# Altium PCB PIC32ETH.PcbDoc (part 1 of 2)
Units mm, origin at the board's own origin, x right, y up, seen from the top; angles counter-clockwise.
Board outline 150 x 100 mm, 4 copper layers (Layer Top, Plane 1, Plane 2, Layer Bottom), stack 1.798 mm thick; 158 components, 118 nets, 530 pads, 132 vias.
Unrouted connection lines stored in the file: 140.
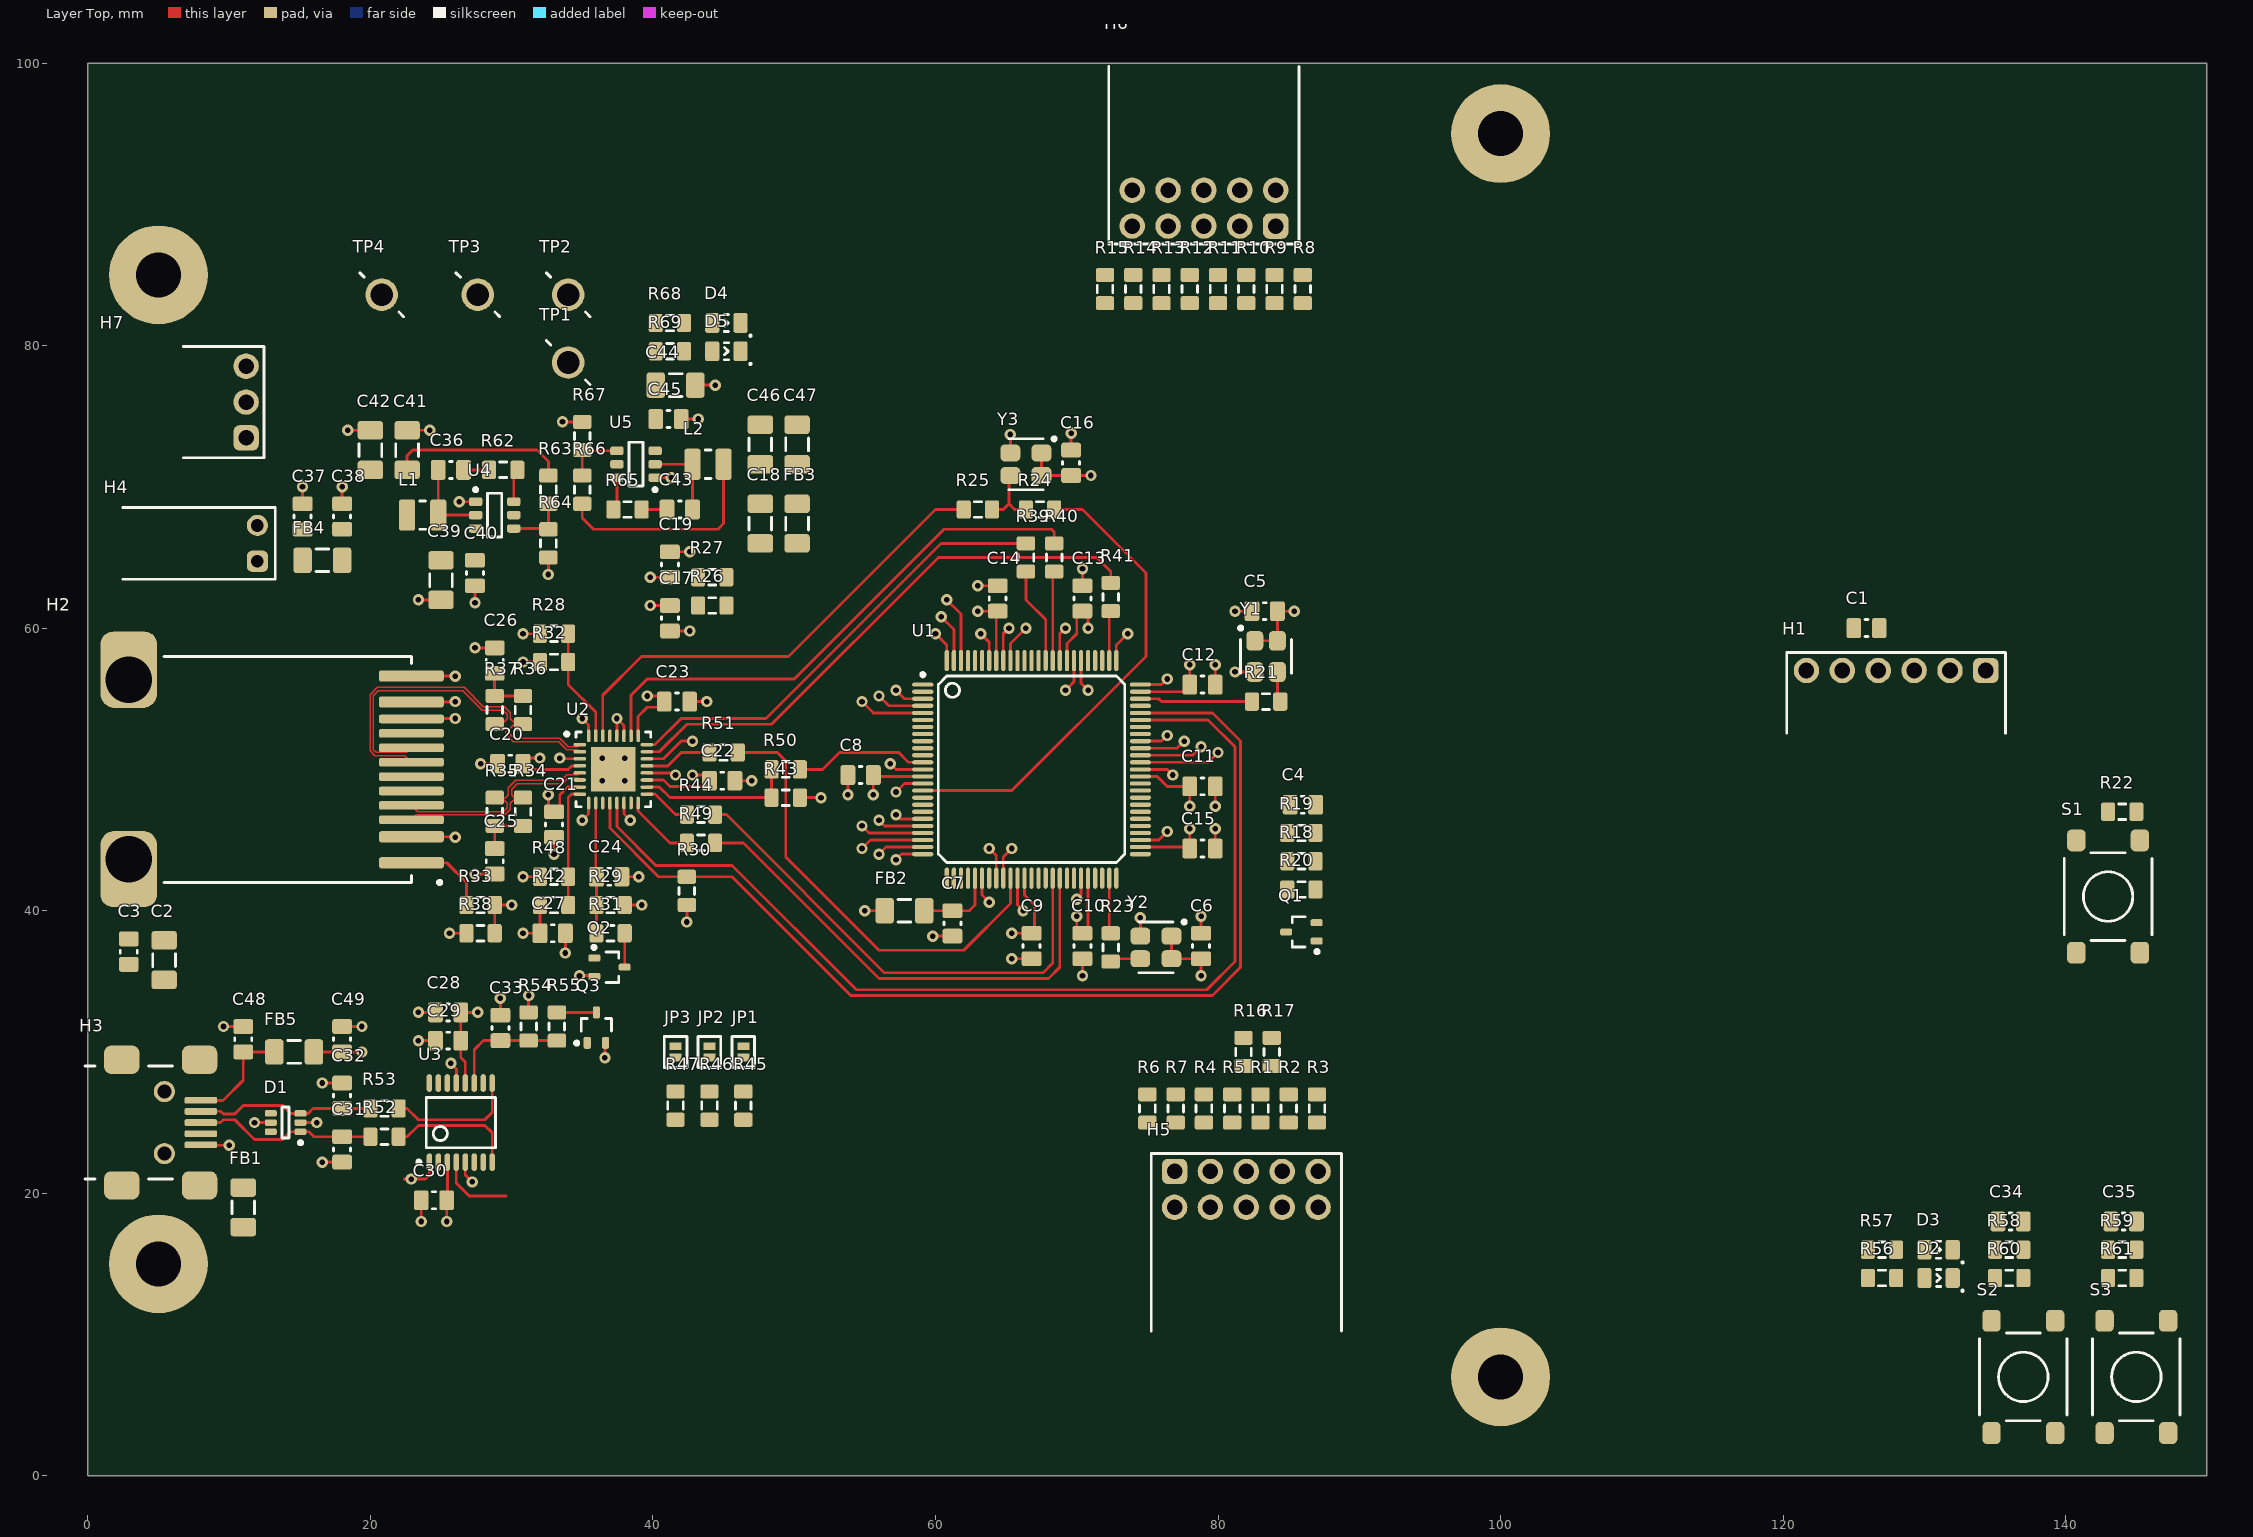
[diagram p0: Layer Top view]
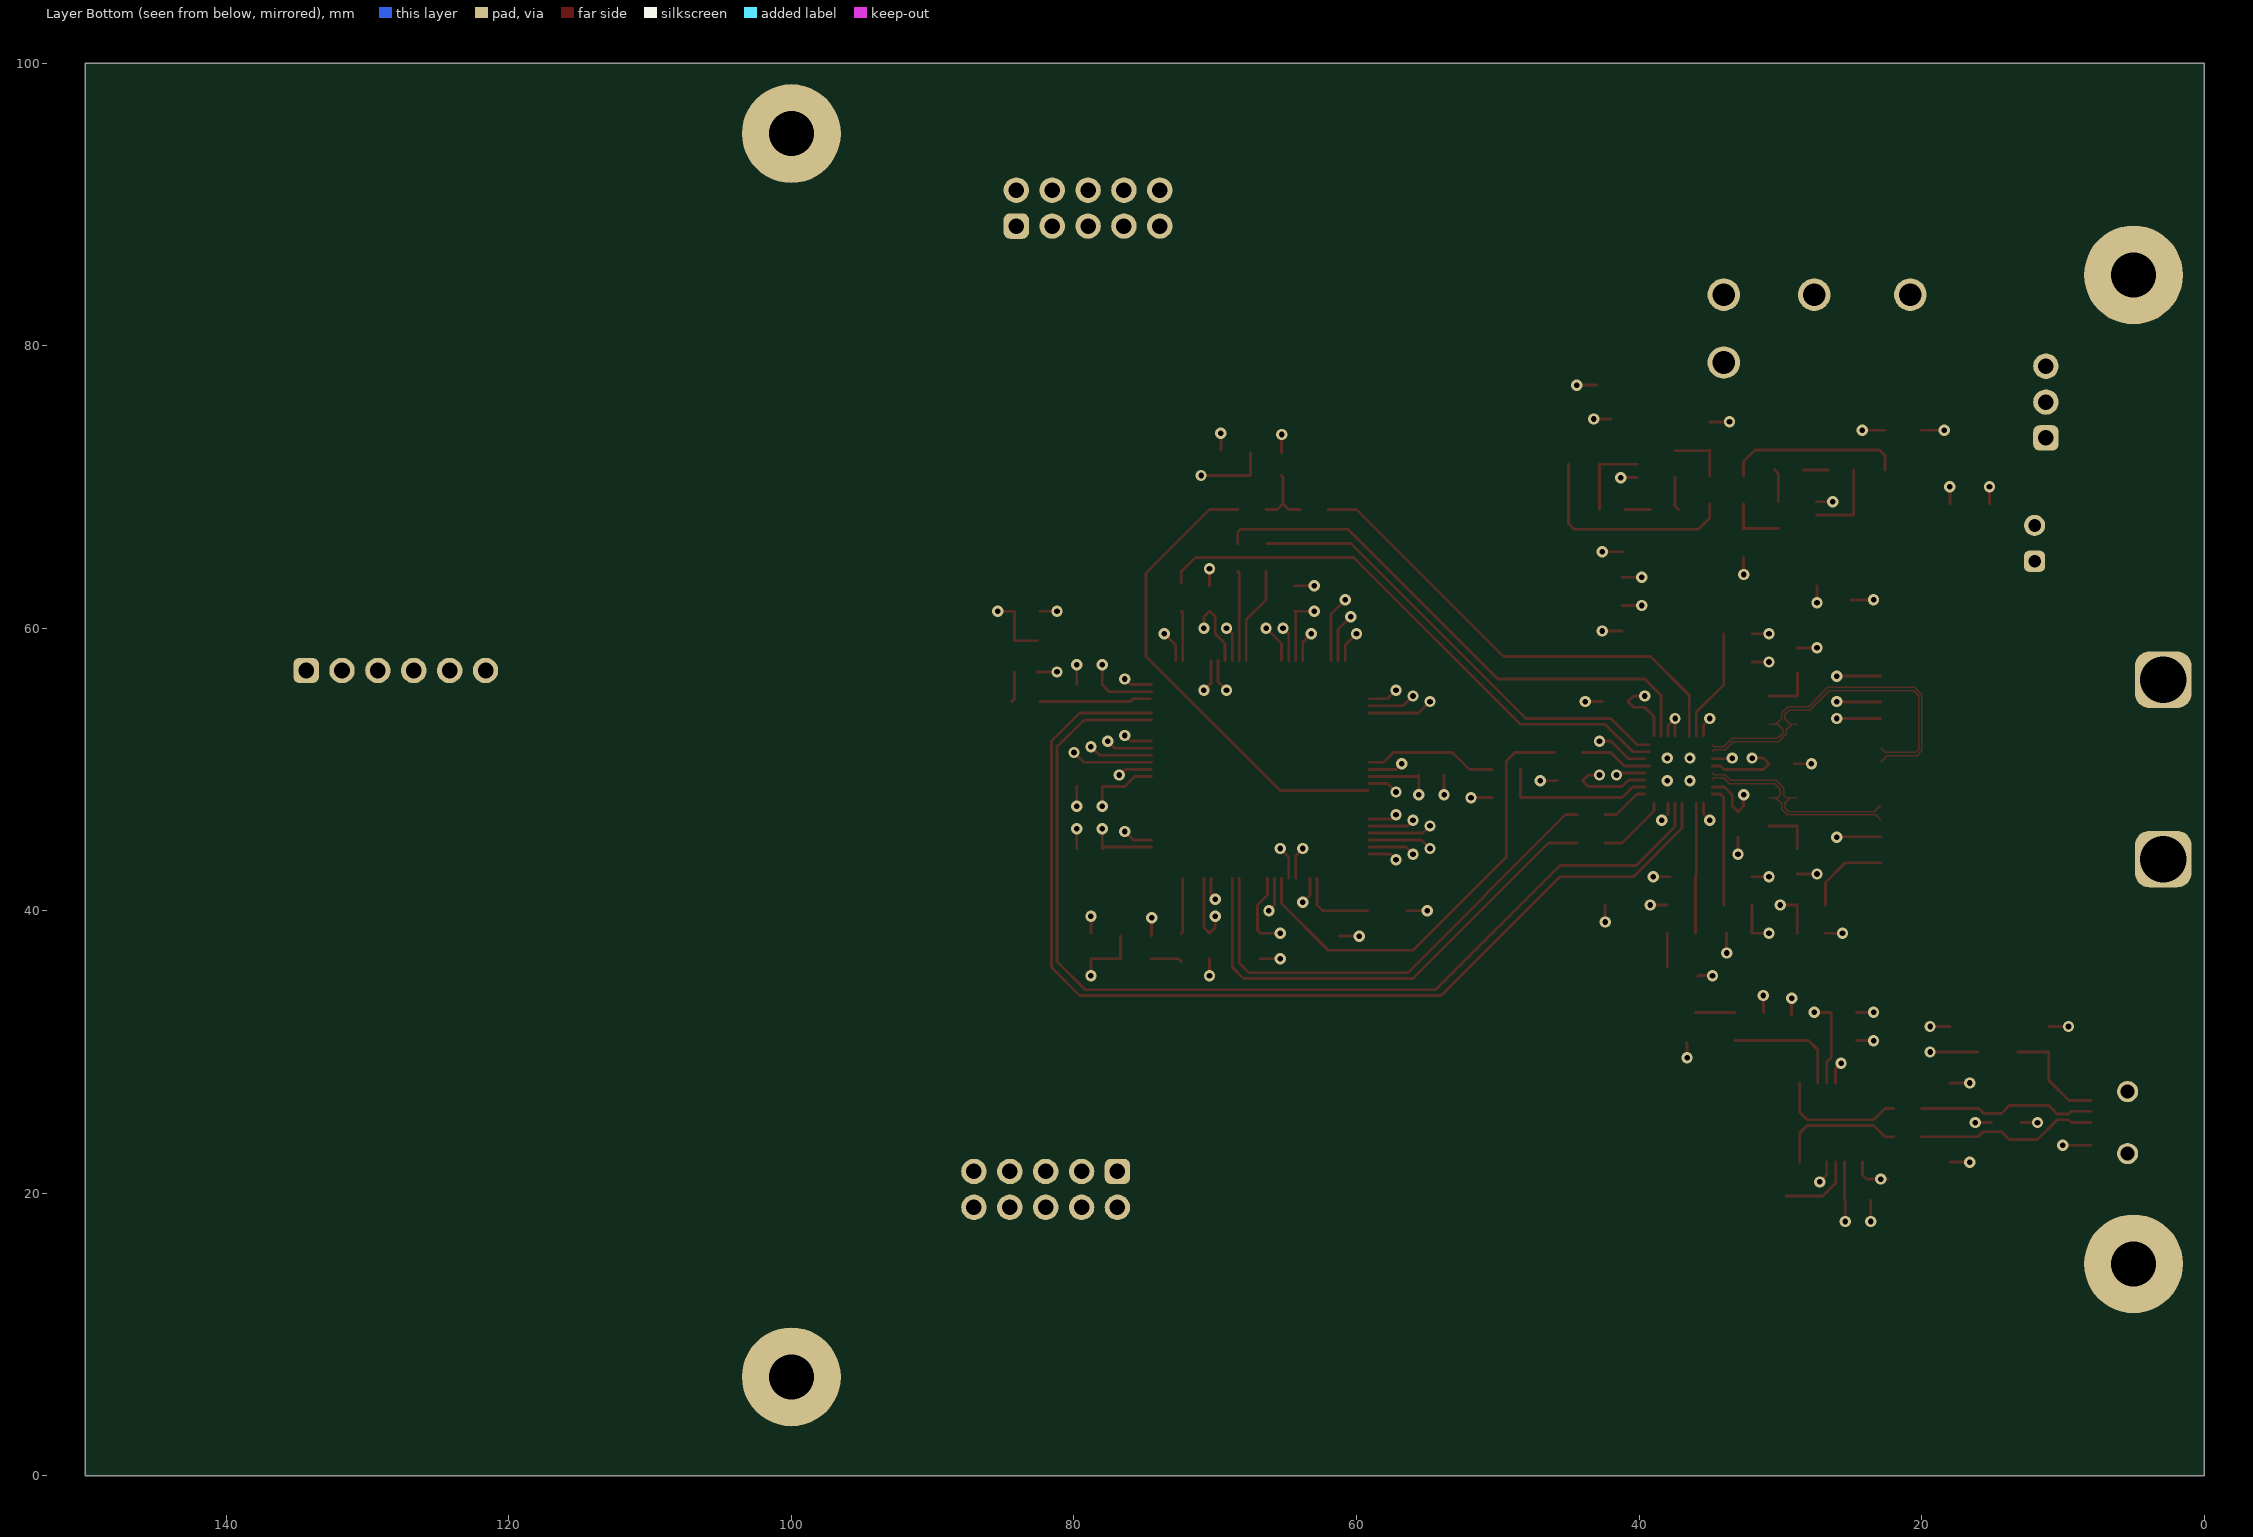
[diagram p1: Layer Bottom view, seen from below]
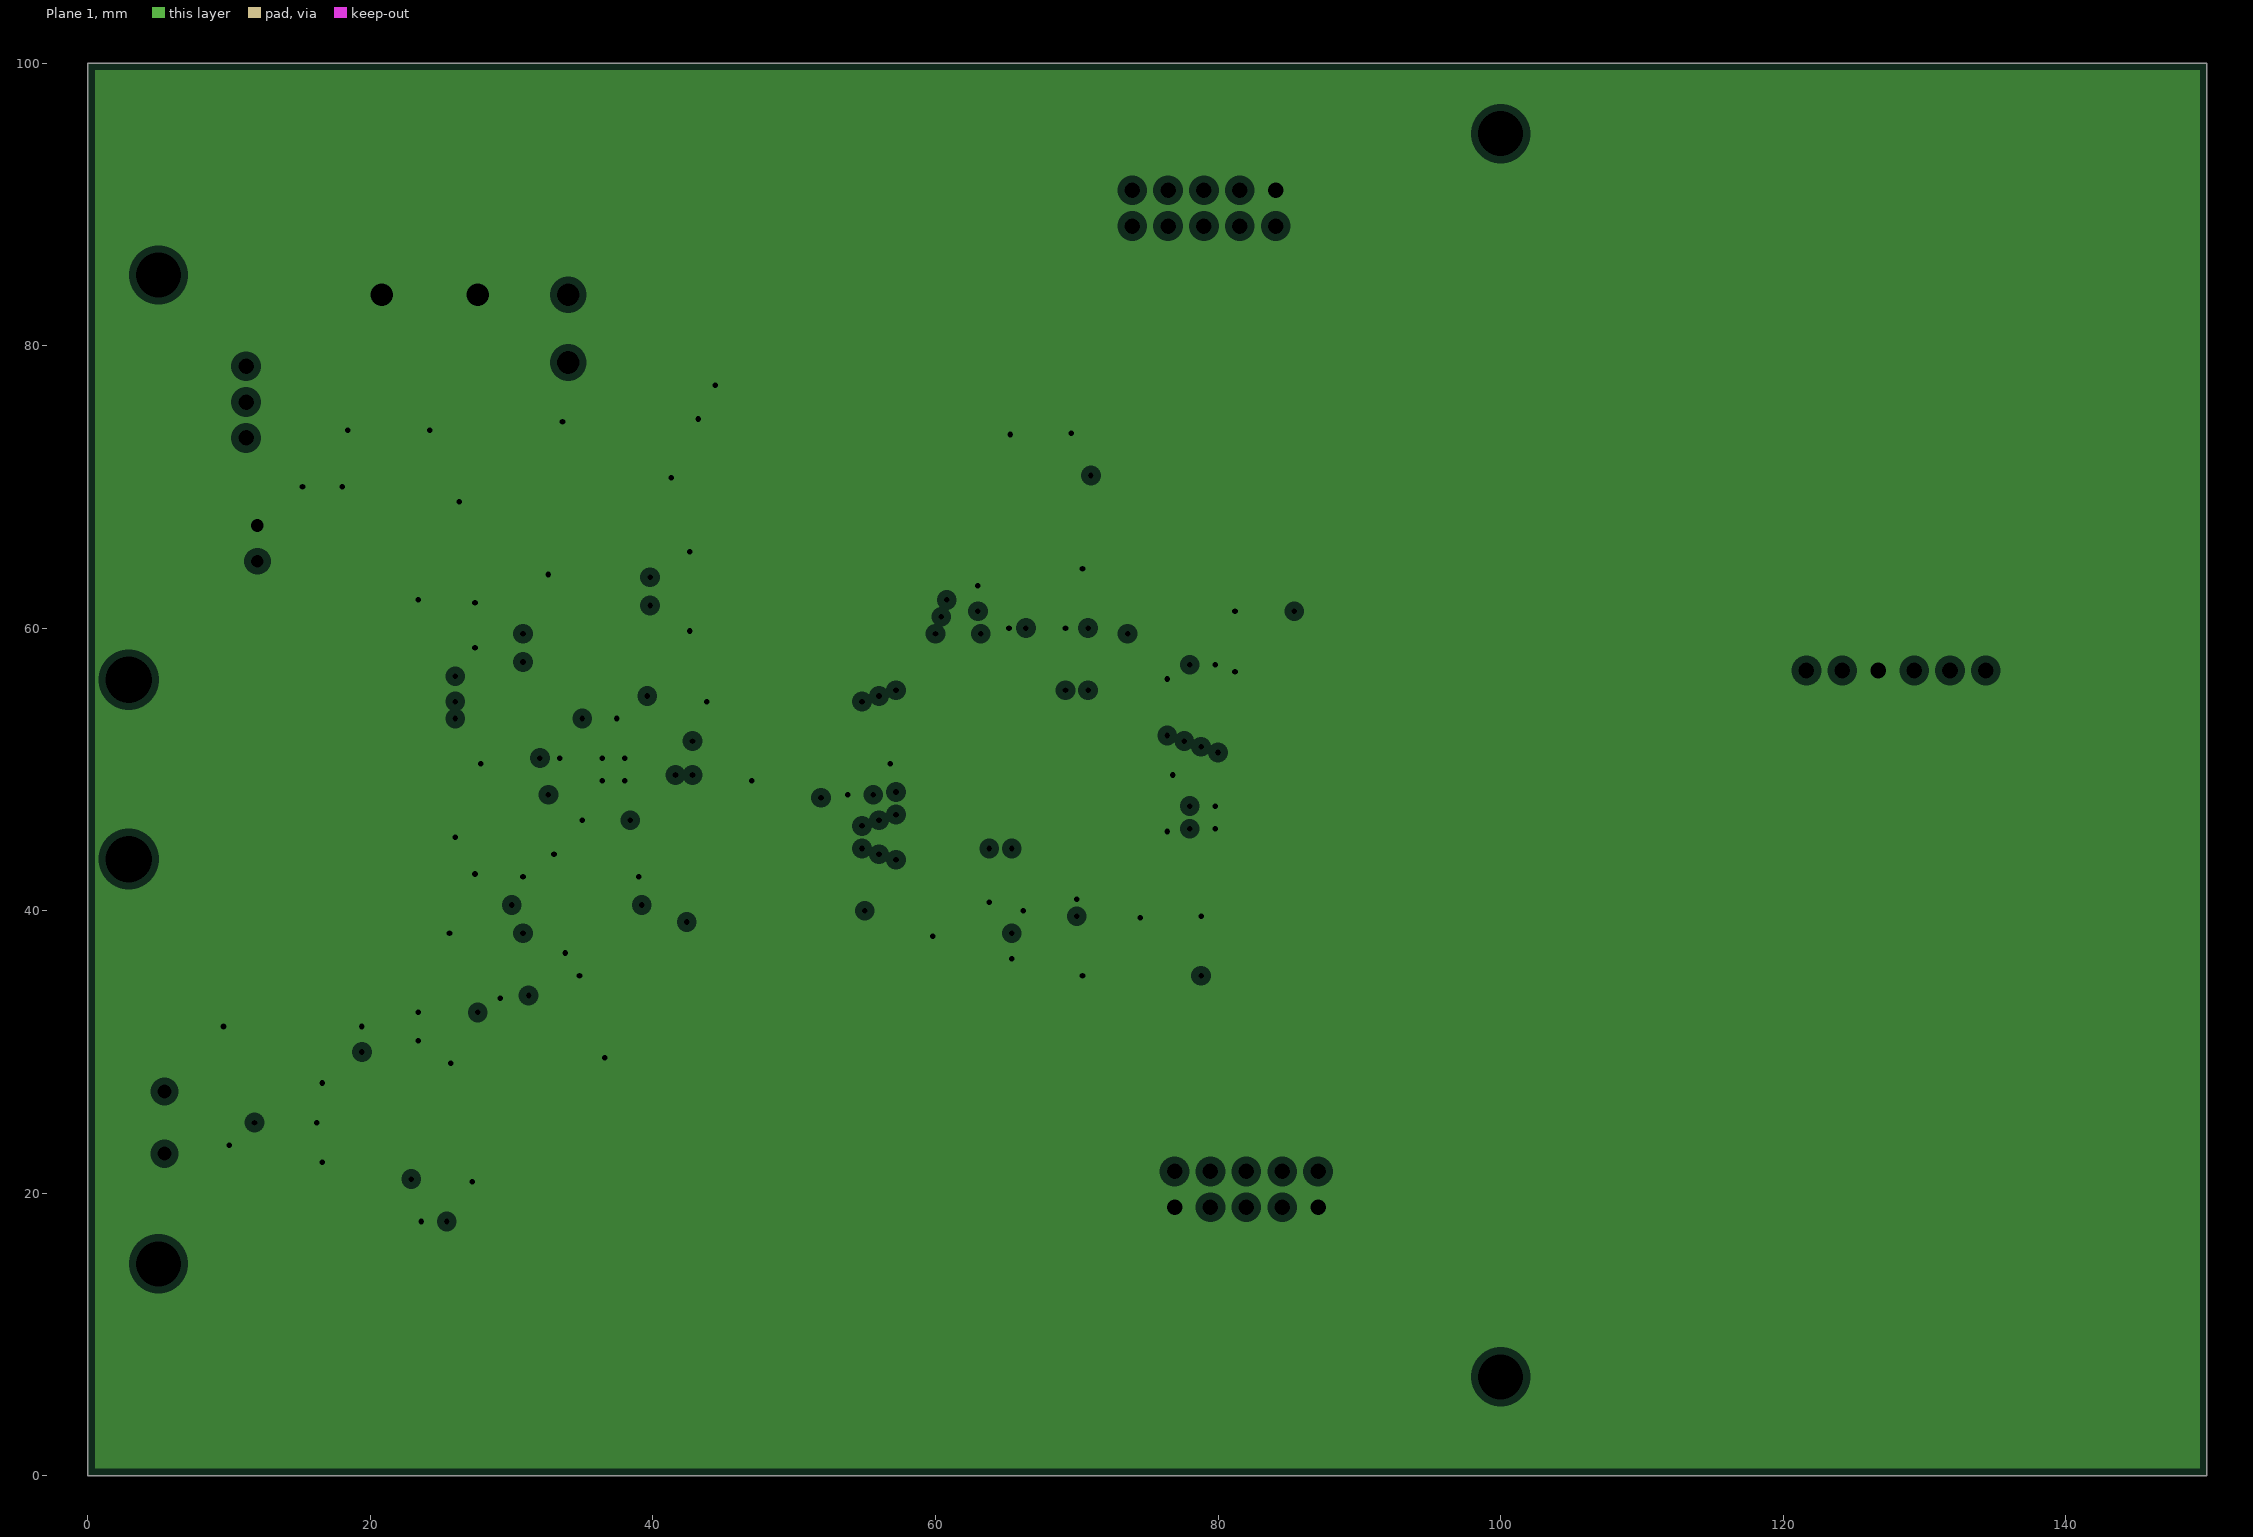
[diagram p2: Plane 1, clearances drawn from the general rule]
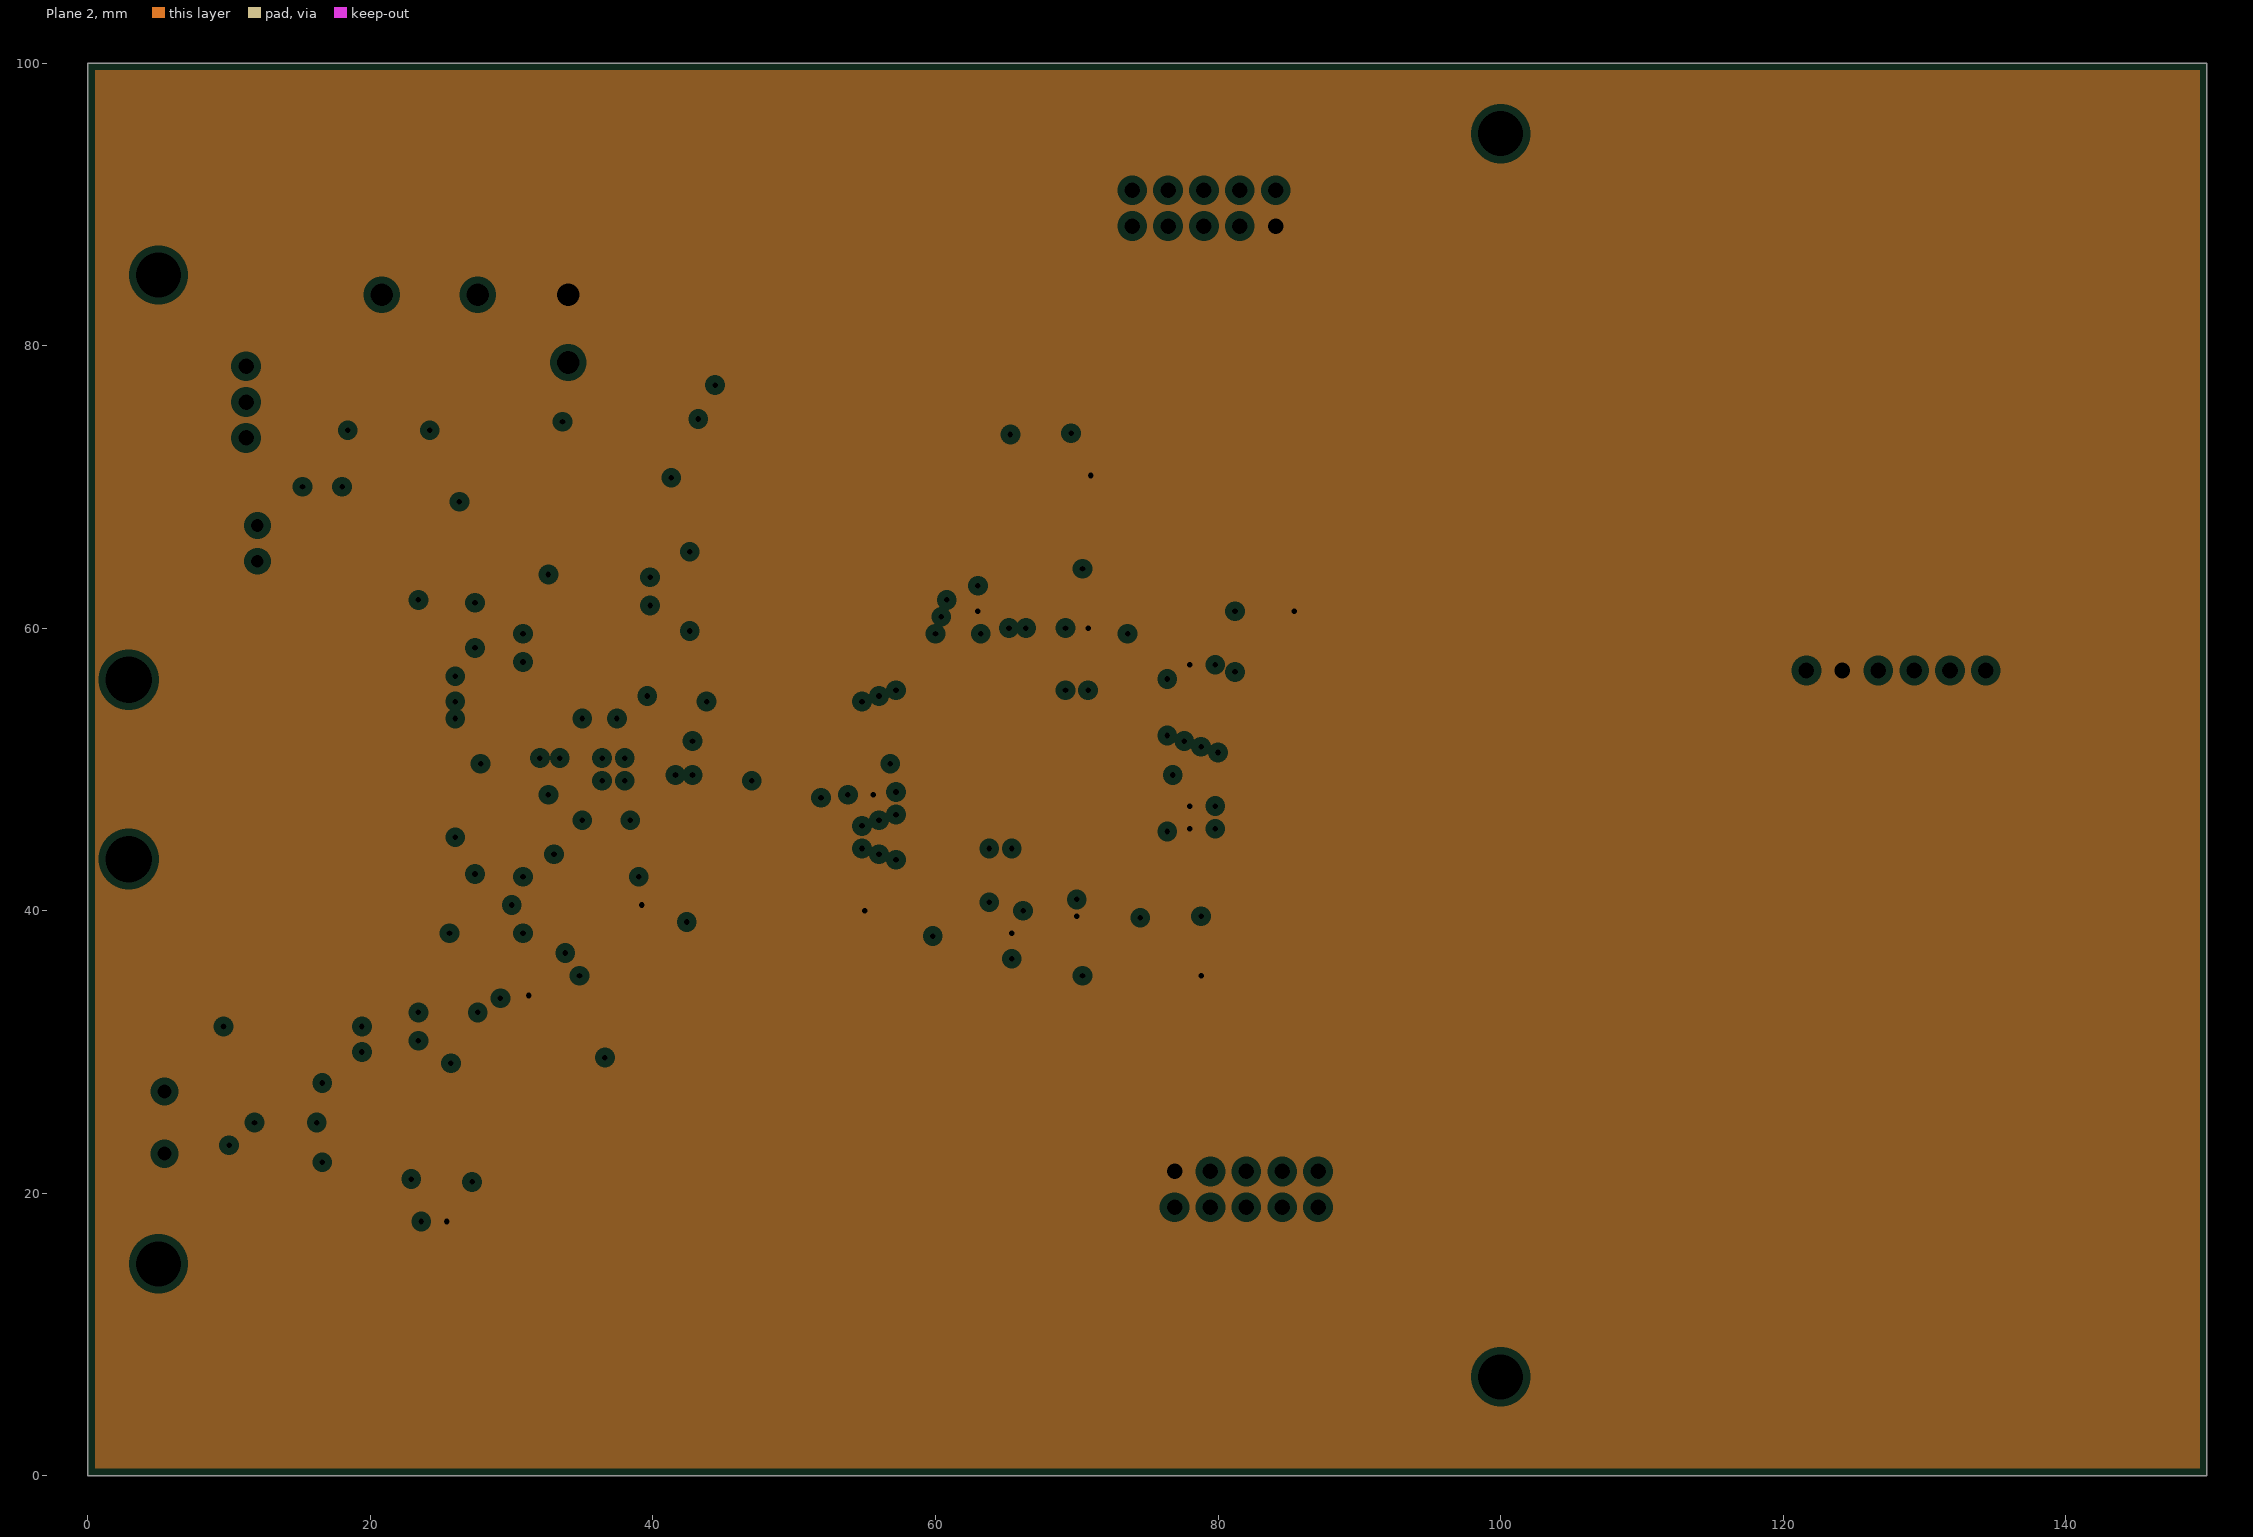
[diagram p3: Plane 2, clearances drawn from the general rule]

## Layer stack, top to bottom
Top Solder: solder mask 0.0102, Solder Resist, Dk 3.5
Layer Top: signal copper 0.035
Dielectric 2: prepreg 0.0711, PP-006, Dk 4.1
Plane 1: plane copper 0.018, net GND
Dielectric 1: dielectric 1.55, FR-4, Dk 4.8
Plane 2: plane copper 0.018, net +3V3
Dielectric 3: prepreg 0.0711, PP-006, Dk 4.1
Layer Bottom: signal copper 0.035
Bottom Solder: solder mask 0.0102, Solder Resist, Dk 3.5

## Board outline
0,0 150,0 150,100 0,100

## Design rules (kind name [scope] priority, off if disabled: settings)
AssemblyTestpoint [All] p1: testpointundercomponent=TRUE minsize=1 maxsize=2.5 preferedsize=1.5 minholesize=0.2 maxholesize=1 preferedholesize=0.8 testpointgrid=0.05 usegrid=TRUE gridtolerance=0 allowsidetop=TRUE allowsidebottom=TRUE
BoardOutlineClearance [All] p1: gap=0.2 ignorepadtopadclearanceinfootprint=FALSE except(0: Arc-SplitContinuation Track-SplitContinuation SMDPad-SplitContinuation THPad-SplitContinuation Via-SplitContinuation Fill-SplitContinuation Poly-SplitContinuation Region-SplitContinuation Text-SplitContinuation)
Clearance [All] p1: gap=0.15 ignorepadtopadclearanceinfootprint=FALSE except(0.1: Arc-Arc Arc-Track Track-Track; 0.3: Arc-THPad Arc-Via Arc-Hole Track-THPad Track-Via Track-Hole SMDPad-THPad SMDPad-Via SMDPad-Hole THPad-THPad THPad-Via THPad-Fill THPad-Poly THPad-Region THPad-Text THPad-Hole Via-Via Via-Fill Via-Poly Via-Region Via-Text Via-Hole Fill-Hole Poly-Hole Region-Hole Text-Hole)
ComponentClearance [All] p1: gap=0.2 collisioncheckmode=3 verticalgap=0.2 showdistances=FALSE
DiffPairsRouting DiffPairsRouting_1 [InDifferentialPairClass('ETH_RX') or InDifferentialPairClass('ETH_TX')] p1: maxlimit=0.127 minlimit=0.127 mostfreqgap=0.127 toplayer_minwidth=0.1 toplayer_maxwidth=0.1 toplayer_prefwidth=0.1 bottomlayer_minwidth=0.1 bottomlayer_maxwidth=0.1 bottomlayer_prefwidth=0.1 impedanceprofiledriven=TRUE impedanceprofileid={D0BF6E26-0691-4E4A-BD39-59AAC70CEA53} impedanceprofilevalue=100.000000 maxuncoupledlength=12.7
DiffPairsRouting [All] p2: maxlimit=0.4 minlimit=0.15 mostfreqgap=0.2 toplayer_minwidth=0.15 toplayer_maxwidth=0.4 toplayer_prefwidth=0.2 bottomlayer_minwidth=0.15 bottomlayer_maxwidth=0.4 bottomlayer_prefwidth=0.2 maxuncoupledlength=13
FabricationTestpoint [All] p1: side=3 testpointundercomponent=TRUE minsize=1 maxsize=2.5 preferedsize=1.5 minholesize=0.2 maxholesize=1 preferedholesize=0.8 testpointgrid=0.05 allowsidetop=TRUE allowsidebottom=TRUE usegrid=TRUE gridtolerance=0
Height [All] p1: minheight=0 maxheight=50 prefheight=50
HoleSize [All] p1: absolutevalues=TRUE maxlimit=6.3 minlimit=0.2 maxpercent=80.000 minpercent=20.000
HoleToHoleClearance [All] p1: gap=0.3 allowstackedmicrovias=FALSE
PlaneClearance [All] p1: clearance=0.5
PlaneConnect [All] p1: pad.planeconnectstyle=Relief pad.reliefexpansion=0.5 pad.reliefentries=4 pad.reliefconductorwidth=0.5 pad.reliefairgap=0.25 via.planeconnectstyle=Direct via.reliefexpansion=0.508 via.reliefentries=4 via.reliefconductorwidth=0.508 via.reliefairgap=0.254
PolygonConnect [All] p1: thpad.connectstyle=Relief thpad.reliefconductorwidth=0.25 thpad.reliefentries=4 thpad.polygonreliefangle="90 Angle" thpad.airgapwidth=0.25 smdpad.connectstyle=Relief smdpad.reliefconductorwidth=0.25 smdpad.reliefentries=4 smdpad.polygonreliefangle="90 Angle" smdpad.airgapwidth=0.25 via.connectstyle=Direct via.reliefconductorwidth=0.254 via.reliefentries=4 via.polygonreliefangle="90 Angle" via.airgapwidth=0.254
RoutingCorners [All] p1: cornerstyle=45-Degree minsetback=2.5 maxsetback=2.5
RoutingVias [All] p1: holewidth=0.4 width=0.8 viastyle="Through Hole" minholewidth=0.25 minwidth=0.5 maxholewidth=0.6 maxwidth=1.2
SilkToSilkClearance [All] p1: silktosilkclearance=0.127
SilkToSolderMaskClearance [IsPad] p1: minsilkscreentomaskgap=0.127 clearancetoexposedcopper=TRUE
SolderMaskExpansion [All] p1: expansion=0.1 istentingtop=FALSE
ViasUnderSMD [All] p1: allowed=FALSE
Width [All] p1: maxlimit=10 minlimit=0.1 preferedwidth=0.2
18 further rules are at their usual default settings.

## Classes and differential pairs
differential pair class USB_DATA: USB_DATA_0 USB_DATA_1
differential pair class ETH_TX: ETH_TX
differential pair class ETH_RX: ETH_RX
net class PER_LED[1..0]: PER_LED0 PER_LED1
net class PER_BTN[1..0]: PER_BTN0 PER_BTN1
net class GPIO_RE[7..0]: GPIO_RE0 GPIO_RE1 GPIO_RE2 GPIO_RE3 GPIO_RE4 GPIO_RE5 GPIO_RE6 GPIO_RE7
component class U_PIC32ETH_Usb: C28 C29 C30 C31 C32 C33 D1 Q3 R52 R53 R54 R55 U3
component class U_PIC32ETH_Power: C36 C37 C38 C39 C40 C41 C42 C43 C44 C45 C46 C47 C48 C49 D4 D5 FB4 FB5 H7 L1 L2 R62 R63 R64 R65 R66 R67 R68 R69 TP1 TP2 TP3 TP4 U4 U5
component class U_PIC32ETH_Pic: C4 C5 C6 C7 C8 C11 C12 C13 C14 C15 C16 FB2 Q1 R1 R2 R3 R4 R5 R6 R7 R8 R9 R10 R11 R12 R13 R14 R15 R16 R17 R18 R19 R20 R21 R22 R23 R24 R25 S1 U1 Y1 Y2 Y3
component class U_PIC32ETH_Peripheral: C34 C35 D2 D3 R56 R57 R58 R59 R60 R61 S2 S3
component class U_PIC32ETH_Ethernet: C17 C18 C19 C20 C21 C22 C23 C24 C25 C26 C27 FB3 JP1 JP2 JP3 Q2 R26 R27 R28 R29 R30 R31 R32 R33 R34 R35 R36 R37 R38 R39 R40 R41 R42 R43 R44 R45 R46 R47 R48 R49 R50 R51 U2
component class PIC32ETH_Main: C1 C2 C3 FB1 H1 H2 H3 H4 H5 H6
differential pair USB_DATA_1: +USB_DATA_1_P -USB_DATA_1_N
differential pair USB_DATA_0: +USB_DATA_0_P -USB_DATA_0_N
differential pair ETH_TX: +ETH_TX_P -ETH_TX_N
differential pair ETH_RX: +ETH_RX_P -ETH_RX_N

## Components (designator, comment, footprint, x,y, rotation, side; value= is the part's Value field where it differs from the comment)
C1 "100nF" C_CHIP2012N 125.9,60 r0 top
C2 "22uF" C_CHIP3216N 5.4,36.5 r90 top
C3 "1nF" C_CHIP2012N 2.9,37.1 r90 top
C4 "100nF" C_CHIP2012N 86,47.5 r180 top
C5 "10nF" C_CHIP2012N 83.3,61.2 r0 top
C6 "10nF" C_CHIP2012N 78.8,37.5 r270 top
C7 "100nF" C_CHIP2012N 61.2,39.1 r270 top
C8 "100nF" C_CHIP2012N 54.7,49.6 r180 top
C9 "100nF" C_CHIP2012N 66.8,37.5 r270 top
C10 "100nF" C_CHIP2012N 70.4,37.5 r270 top
C11 "100nF" C_CHIP2012N 78.9,48.8 r0 top
C12 "100nF" C_CHIP2012N 78.9,56 r0 top
C13 "100nF" C_CHIP2012N 70.4,62.1 r90 top
C14 "100nF" C_CHIP2012N 64.4,62.1 r90 top
C15 "100nF" C_CHIP2012N 78.9,44.4 r0 top
C16 "10nF" C_CHIP2012N 69.6,71.7 r270 top
C17 "1uF" C_CHIP2012N 41.2,60.7 r270 top
C18 "10uF" C_CHIP3216N 47.6,67.4 r270 top
C19 "1uF" C_CHIP2012N 41.2,64.5 r90 top
C20 "10nF" C_CHIP2012N 29.9,50.4 r0 top
C21 "10nF" C_CHIP2012N 33,46.1 r90 top
C22 "10nF" C_CHIP2012N 44.9,49.2 r180 top
C23 "10nF" C_CHIP2012N 41.7,54.8 r180 top
C24 "220nF" C_CHIP2012N 36.9,42.4 r180 top
C25 "100nF" C_CHIP2012N 28.8,43.5 r270 top
C26 "100nF" C_CHIP2012N 28.8,57.7 r90 top
C27 "100nF" C_CHIP2012N 32.9,38.4 r0 top
C28 "100nF" C_CHIP2012N 25.5,32.8 r180 top
C29 "10nF" C_CHIP2012N 25.5,30.8 r0 top
C30 "100nF" C_CHIP2012N 24.5,19.5 r180 top
C31 "47pF" C_CHIP2012N 18,23.1 r90 top
C32 "47pF" C_CHIP2012N 18,26.9 r270 top
C33 "220nF" C_CHIP2012N 29.2,31.7 r270 top
C34 "100nF" C_CHIP2012N 136.1,18 r180 top
C35 "100nF" C_CHIP2012N 144.1,18 r180 top
C36 "100nF" C_CHIP2012N 25.7,71.2 r0 top
C37 "1uF" C_CHIP2012N 15.2,67.9 r270 top
C38 "1uF" C_CHIP2012N 18,67.9 r270 top
C39 "10uF" C_CHIP3216N 25,63.4 r90 top
C40 "100nF" C_CHIP2012N 27.4,63.9 r90 top
C41 "22uF" C_CHIP3216N 22.6,72.6 r270 top
C42 "22uF" C_CHIP3216N 20,72.6 r270 top
C43 "100nF" C_CHIP2012N 41.9,68.4 r180 top
C44 "10uF" C_CHIP3216N 41.6,77.2 r180 top
C45 "100nF" C_CHIP2012N 41.1,74.8 r180 top
C46 "22uF" C_CHIP3216N 47.6,73 r270 top
C47 "22uF" C_CHIP3216N 50.2,73 r270 top
C48 "1uF" C_CHIP2012N 11,30.9 r270 top
C49 "1uF" C_CHIP2012N 18,30.9 r270 top
D1 "DRTR5V0U4S-7" D_SOT65P210X100-6N 14,25 r180 top
D2 "APT2012LZGCK" D_LEDCHIP2012N 131,14 r180 top
D3 "APT2012LZGCK" D_LEDCHIP2012N 131,16 r180 top
D4 "APT2012LZGCK" D_LEDCHIP2012N 45.2,81.6 r180 top
D5 "APT2012LZGCK" D_LEDCHIP2012N 45.2,79.6 r180 top
FB1 "120R 100MHz" FB_CHIP3216N 11,19 r270 top
FB2 "120R 100MHz" FB_CHIP3216N 57.8,40 r0 top
FB3 "120R 100MHz" FB_CHIP3216N 50.2,67.4 r270 top
FB4 "120R 100MHz" FB_CHIP3216N 16.6,64.8 r0 top
FB5 "120R 100MHz" FB_CHIP3216N 14.6,30 r0 top
H1 "TSW-106-08-G-S-RA" H_TSW-106-08-G-S-RA 128,57 r180 top
H2 "J3011G21DNL" H_J3011G21DNL 2.9,50 r270 top locked
H3 "897-43-005-00-100001" H_897-43-005-00-100001 8,25 r180 top locked
H4 "76382-302LF" H_76382-302LF 12,66 r90 top locked
H5 "SSW-105-02-G-D-RA" H_SSW-105-02-G-D-RA 82,20.27 r0 top
H6 "SSW-105-02-G-D-RA" H_SSW-105-02-G-D-RA 79,89.73 r180 top
H7 "TSW-103-08-G-S-RA" H_TSW-103-08-G-S-RA 11.2,76 r90 top locked
JP1 "1308" JP_SOLDER-2POS-1308 46.4,30 r90 top
JP2 "1308" JP_SOLDER-2POS-1308 44,30 r90 top
JP3 "1308" JP_SOLDER-2POS-1308 41.6,30 r90 top
L1 "4.7uH" L_CHIP2520N 23.7,68 r180 top
L2 "4.7uH" L_CHIP2520N 43.9,71.6 r0 top
Q1 "DMG1012UW-7" Q_SOT65P210X100-3N 85.9,38.5 r180 top
Q2 "DMG1012UW-7" Q_SOT65P210X100-3N 36.925,36 r0 top
Q3 "DMG1012UW-7" Q_SOT65P210X100-3N 36,31.725 r90 top
R1 "330R" R_CHIP2012N 83,26 r90 top
R2 "330R" R_CHIP2012N 85,26 r90 top
R3 "330R" R_CHIP2012N 87,26 r90 top
R4 "330R" R_CHIP2012N 79,26 r90 top
R5 "330R" R_CHIP2012N 81,26 r90 top
R6 "330R" R_CHIP2012N 75,26 r90 top
R7 "330R" R_CHIP2012N 77,26 r90 top
R8 "330R" R_CHIP2012N 86,84 r270 top
R9 "330R" R_CHIP2012N 84,84 r270 top
R10 "330R" R_CHIP2012N 82,84 r270 top
R11 "330R" R_CHIP2012N 80,84 r270 top
R12 "330R" R_CHIP2012N 78,84 r270 top
R13 "330R" R_CHIP2012N 76,84 r270 top
R14 "330R" R_CHIP2012N 74,84 r270 top
R15 "330R" R_CHIP2012N 72,84 r270 top
R16 "4.7kR" R_CHIP2012N 81.8,30 r90 top
R17 "4.7kR" R_CHIP2012N 83.8,30 r90 top
R18 "10kR" R_CHIP2012N 85.9,43.5 r180 top
R19 "330R" R_CHIP2012N 85.9,45.5 r0 top
R20 "330R" R_CHIP2012N 85.9,41.5 r180 top
R21 "33R" R_CHIP2012N 83.4,54.8 r180 top
R22 "10kR" R_CHIP2012N 144,47 r0 top
R23 "33R" R_CHIP2012N 72.4,37.4 r90 top
R24 "33R" R_CHIP2012N 67.4,68.4 r0 top
R25 "33R" R_CHIP2012N 63,68.4 r180 top
R26 "1R" R_CHIP2012N 44.2,61.6 r180 top
R27 "1R" R_CHIP2012N 44.2,63.6 r180 top
R28 "10kR" R_CHIP2012N 33,59.6 r0 top
R29 "10kR" R_CHIP2012N 37,40.4 r0 top
R30 "10kR" R_CHIP2012N 42.4,41.4 r270 top
R31 "330R" R_CHIP2012N 37,38.4 r180 top
R32 "1kR" R_CHIP2012N 33,57.6 r0 top
R33 "1kR" R_CHIP2012N 27.8,40.4 r0 top
R34 "49.9R" R_CHIP2012N 30.8,47 r90 top
R35 "49.9R" R_CHIP2012N 28.8,47 r90 top
R36 "49.9R" R_CHIP2012N 30.8,54.2 r270 top
R37 "49.9R" R_CHIP2012N 28.8,54.2 r270 top
R38 "10kR" R_CHIP2012N 27.8,38.4 r0 top
R39 "33R" R_CHIP2012N 66.4,65 r90 top
R40 "33R" R_CHIP2012N 68.4,65 r90 top
R41 "33R" R_CHIP2012N 72.4,62.2 r90 top
R42 "18.7kR" R_CHIP2012N 33,40.4 r180 top
R43 "1kR" R_CHIP2012N 49.4,48 r0 top
R44 "33R" R_CHIP2012N 43.4,46.8 r180 top
R45 "1kR" R_CHIP2012N 46.4,26.2 r90 top
R46 "1kR" R_CHIP2012N 44,26.2 r90 top
R47 "1kR" R_CHIP2012N 41.6,26.2 r90 top
R48 "1.91kR" R_CHIP2012N 33,42.4 r0 top
R49 "33R" R_CHIP2012N 43.4,44.8 r180 top
R50 "33R" R_CHIP2012N 49.4,50 r180 top
R51 "33R" R_CHIP2012N 45,51.2 r180 top
R52 "33R" R_CHIP2012N 21,24 r0 top
R53 "33R" R_CHIP2012N 21,26 r0 top
R54 "10kR" R_CHIP2012N 31.2,31.8 r90 top
R55 "330R" R_CHIP2012N 33.2,31.8 r270 top
R56 "330R" R_CHIP2012N 127,14 r0 top
R57 "330R" R_CHIP2012N 127,16 r0 top
R58 "10kR" R_CHIP2012N 136,16 r180 top
R59 "10kR" R_CHIP2012N 144,16 r180 top
R60 "10kR" R_CHIP2012N 136,14 r180 top
R61 "10kR" R_CHIP2012N 144,14 r180 top
R62 "30R" R_CHIP2012N 29.4,71.2 r180 top
R63 "52.3kR" R_CHIP2012N 32.6,69.8 r90 top
R64 "10kR" R_CHIP2012N 32.6,66 r90 top
R65 "30R" R_CHIP2012N 38.2,68.4 r0 top
R66 "31.6kR" R_CHIP2012N 35,69.8 r270 top
R67 "10kR" R_CHIP2012N 35,73.6 r270 top
R68 "330R" R_CHIP2012N 41.2,81.6 r180 top
R69 "1.2kR" R_CHIP2012N 41.2,79.6 r180 top
S1 "PTS645SL50SMTR92 LFS" S_CHIPP620X620-4N 143,41 r270 top
S2 "PTS645SL50SMTR92 LFS" S_CHIPP620X620-4N 137,7 r90 top
S3 "PTS645SL50SMTR92 LFS" S_CHIPP620X620-4N 145,7 r90 top
TP1 "5006" TP_5006 34,78.8 r0 top
TP2 "5006" TP_5006 34,83.6 r0 top
TP3 "5006" TP_5006 27.6,83.6 r0 top
TP4 "5006" TP_5006 20.8,83.6 r0 top
U1 "PIC32MZ1024EFE100-I/PF" U_QFP50P1600X1600X120-100N 66.8,50 r0 top
U2 "ICS1894-33" U_QFN50P500X500X100-HS-33N 37.2,50 r0 top
U3 "FT230XS-R" U_TSOP64P600X135-16N 26.4,25 r90 top
U4 "TPS56339DDCR" U_SOT95P280X145-6N 28.8,68 r0 top
U5 "TPS56339DDCR" U_SOT95P280X145-6N 38.8,71.6 r180 top
Y1 "32.768kHz" Y_CHIPP320X250-4N 83.4,58 r270 top
Y2 "24MHz" Y_CHIPP320X250-4N 75.6,37.4 r180 top
Y3 "50MHz" Y_CHIPP320X250-4N 66.4,71.6 r180 top

## Footprints (in the part's own frame and the unit in brackets; to place one, negate y for a bottom-side part, rotate by r counter-clockwise, add the part's x,y. Pads: shape width x height; smd on the part's side, far side on the other; paste and mask are expansions set on the pad)
C_CHIP2012N [mm] "Chip Capacitor, 2-Leads, Body 2.00x1.25mm, IPC Medium Density"
  rrect30% 1.05x1.4 smd: 1(-0.9,0) 2(0.9,0)
  silkscreen extent -0.1,-0.6 0.1,0.6, body extent -1,-0.63 1,0.63, height 0.8
C_CHIP3216N [mm] "Chip Capacitor, 2-Leads, Body 3.20x1.60mm, IPC Medium Density"
  rrect30% 1.3x1.8 smd: 1(-1.4,0) 2(1.4,0)
  silkscreen extent -0.45,-0.8 0.45,0.8, body extent -1.6,-0.8 1.6,0.8, height 1
D_LEDCHIP2012N [mm] "LED Chip, 2-Leads, Body 3.20x1.60mm, IPC Medium Density"
  rrect30% 1x1.4 smd: 1(-1,0) 2(1,0)
  silkscreen extent -1.75,-0.6 0.15,0.95, body extent -1,-0.62 1,0.63, height 0.74
D_SOT65P210X100-6N [mm] "SOT-23, 6-Leads, Body 2.15x2.10mm, Pitch 0.65mm, IPC Medium Density"
  rrect50% 0.85x0.45 smd: 1(-1.05,0.65) 2(-1.05,0) 3(-1.05,-0.65) 4(1.05,-0.65) 5(1.05,0) 6(1.05,0.65)
  silkscreen extent -1.18,-1.1 0.25,1.55, body extent -1.05,-1.07 1.05,1.07, height 1
FB_CHIP3216N [mm] "Chip Ferrite Bead, 2-Leads, Body 3.20x1.60mm, IPC Medium Density"
  rrect30% 1.3x1.8 smd: 1(-1.4,0) 2(1.4,0)
  silkscreen extent -0.45,-0.8 0.45,0.8, body extent -1.6,-0.8 1.6,0.8, height 1.1
H_897-43-005-00-100001 [mm] "H USB SOCKET B-MINI ANGLE SMT"
  rrect50% 2.3x0.48 smd: 1(0,-1.575) 2(0,-0.787) 3(0,0) 4(0,0.787) 5(0,1.575)
  rrect50% 2.5x2 smd: 6(0.089,4.445) 6(0.089,-4.445) 6(5.601,4.445) 6(5.601,-4.445)
  round 1.5 hole 1: 7(2.578,-2.197) 8(2.578,2.197)
  silkscreen extent 2,-4 8.2,4, body extent -0.73,-4.95 8.47,4.95, height 4.12
H_76382-302LF [mm] "H GENERAL HEADER 2POS 1ROW 2.54mm ANGLE THT"
  rrect50% 1.5x1.5 hole 0.9: 1(-1.27,0)
  round 1.5 hole 0.9: 2(1.27,0)
  silkscreen extent -2.54,-1.27 2.54,9.53, body extent -2.49,-0.3 2.5,10.75, height 5.35
H_J3011G21DNL [mm] "H RJ45 SOCKET 1PORT ANGLE SMT"
  rrect50% 0.81x4.6 smd: 1(6.61,20) 2(4.77,20) 11(-4.77,20) 12(-6.61,20)
  rrect50% 0.61x4.6 smd: 3(3.57,20) 4(2.55,20) 5(1.53,20) 6(0.51,20) 7(-0.51,20) 8(-1.53,20) 9(-2.55,20) 10(-3.57,20)
  rrect50% 3.5x4 smd: 13(-8,0) 13(8,0)
  rrect50% 4x4 hole 3.3: 13(-6.35,0) 13(6.35,0)
  silkscreen extent -8,2.5 8.12,22.13, body extent -9.4,-5.26 9.4,21.49, height 14.62
H_SSW-105-02-G-D-RA [mm] "H GENERAL SOCKET 10POS 2ROW 2.54mm ANGLE THT"
  rrect50% 1.8x1.8 hole 1.1: 1(-5.08,1.27)
  round 1.8 hole 1.1: 2(-5.08,-1.27) 3(-2.54,1.27) 4(-2.54,-1.27) 5(0,1.27) 6(0,-1.27) 7(2.54,1.27) 8(2.54,-1.27) 9(5.08,1.27) 10(5.08,-1.27)
  silkscreen extent -6.73,-10.03 6.73,2.54, body extent -6.6,-11.3 6.6,1.47, height 5.02
H_TSW-103-08-G-S-RA [mm] "H GENERAL HEADER 3POS 1ROW 2.54mm ANGLE THT"
  rrect50% 1.8x1.8 hole 1.1: 1(-2.54,0)
  round 1.8 hole 1.1: 2(0,0) 3(2.54,0)
  silkscreen extent -3.94,-1.27 3.94,4.44, body extent -3.81,-0.32 3.81,9.91, height 3.05
H_TSW-106-08-G-S-RA [mm] "H GENERAL HEADER 6POS 1ROW 2.54mm ANGLE THT"
  rrect50% 1.8x1.8 hole 1.1: 1(-6.35,0)
  round 1.8 hole 1.1: 2(-3.81,0) 3(-1.27,0) 4(1.27,0) 5(3.81,0) 6(6.35,0)
  silkscreen extent -7.75,-1.27 7.75,4.45, body extent -7.62,-0.32 7.62,9.91, height 3.05
JP_SOLDER-2POS-1308 [mm] "JP SOLDER 2POS 1308"
  rect 0.55x0.85 smd: 1(-0.4,0) 2(0.4,0)
  silkscreen extent -1.1,-0.8 1.1,0.8
L_CHIP2520N [mm] "Chip Inductor, 2-Leads, Body 2.50x2.00mm, IPC Medium Density"
  rrect30% 1.15x2.2 smd: 1(-1.1,0) 2(1.1,0)
  silkscreen extent -0.2,-1 0.2,1, body extent -1.25,-1 1.25,1, height 0.9
Q_SOT65P210X100-3N [mm] "SOT23, 3-Leads, Body 2.15x2.10mm, Pitch 0.65mm, IPC Medium Density"
  rrect50% 0.85x0.5 smd: 1(-1.075,0.65) 2(-1.075,-0.65) 3(1.075,0)
  silkscreen extent -1.23,-1.07 0.65,1.52, body extent -1.05,-1.07 1.05,1.07, height 1
R_CHIP2012N [mm] "Chip Resistor, 2-Leads, Body 2.00x1.25mm, IPC Medium Density"
  rrect30% 1x1.3 smd: 1(-1,0) 2(1,0)
  silkscreen extent -0.25,-0.55 0.25,0.55, body extent -1,-0.63 1,0.63, height 0.5
S_CHIPP620X620-4N [mm] "Chip, 4-Leads, Body 6.20x6.20mm, IPC Medium Density"
  rrect50% 1.55x1.3 smd: 1(-3.975,2.25) 2(3.975,2.25) 3(-3.975,-2.25) 4(3.975,-2.25)
  silkscreen extent -3.1,-3.1 3.1,3.1, body extent -4.5,-3.1 4.5,3.1, height 4.3
TP_5006 [mm] "Testpoint"
  round 2.3 hole 1.6: 1(0,0)
  silkscreen extent -1.56,-1.56 1.56,1.56, body extent -2.25,-2.25 2.25,2.25, height 5.61
U_QFN50P500X500X100-HS-33N [mm] "QFN, 32-Leads, Body 5.00x5.00mm, Pitch 0.50mm, Thermal Pad 3.15x3.15mm, IPC Medium Density"
  oval 0.9x0.25 smd: 1(-2.375,1.75) 2(-2.375,1.25) 3(-2.375,0.75) 4(-2.375,0.25) 5(-2.375,-0.25) 6(-2.375,-0.75) 7(-2.375,-1.25) 8(-2.375,-1.75) 17(2.375,-1.75) 18(2.375,-1.25) 19(2.375,-0.75) 20(2.375,-0.25) 21(2.375,0.25) 22(2.375,0.75) 23(2.375,1.25) 24(2.375,1.75)
  oval 0.25x0.9 smd: 9(-1.75,-2.375) 10(-1.25,-2.375) 11(-0.75,-2.375) 12(-0.25,-2.375) 13(0.25,-2.375) 14(0.75,-2.375) 15(1.25,-2.375) 16(1.75,-2.375) 25(1.75,2.375) 26(1.25,2.375) 27(0.75,2.375) 28(0.25,2.375) 29(-0.25,2.375) 30(-0.75,2.375) 31(-1.25,2.375) 32(-1.75,2.375)
  rect 3.15x3.15 smd: 33(0,0)
  silkscreen extent -3.42,-2.65 2.65,2.65, body extent -2.55,-2.55 2.55,2.55, height 1
U_QFP50P1600X1600X120-100N [mm] "QFP, 100-Leads, Body 16.00x16.00mm, Pitch 0.50mm, IPC Medium Density"
  oval 1.5x0.3 smd: 1(-7.7,6) 2(-7.7,5.5) 3(-7.7,5) 4(-7.7,4.5) 5(-7.7,4) 6(-7.7,3.5) 7(-7.7,3) 8(-7.7,2.5) 9(-7.7,2) 10(-7.7,1.5) 11(-7.7,1) 12(-7.7,0.5) 13(-7.7,0) 14(-7.7,-0.5) 15(-7.7,-1) 16(-7.7,-1.5) 17(-7.7,-2) 18(-7.7,-2.5) 19(-7.7,-3) 20(-7.7,-3.5) 21(-7.7,-4) 22(-7.7,-4.5) 23(-7.7,-5) 24(-7.7,-5.5) 25(-7.7,-6) 51(7.7,-6) 52(7.7,-5.5) 53(7.7,-5) 54(7.7,-4.5) 55(7.7,-4) 56(7.7,-3.5) 57(7.7,-3) 58(7.7,-2.5) 59(7.7,-2) 60(7.7,-1.5) 61(7.7,-1) 62(7.7,-0.5) 63(7.7,0) 64(7.7,0.5) 65(7.7,1) 66(7.7,1.5) 67(7.7,2) 68(7.7,2.5) 69(7.7,3) 70(7.7,3.5) 71(7.7,4) 72(7.7,4.5) 73(7.7,5) 74(7.7,5.5) 75(7.7,6)
  oval 0.3x1.5 smd: 26(-6,-7.7) 27(-5.5,-7.7) 28(-5,-7.7) 29(-4.5,-7.7) 30(-4,-7.7) 31(-3.5,-7.7) 32(-3,-7.7) 33(-2.5,-7.7) 34(-2,-7.7) 35(-1.5,-7.7) 36(-1,-7.7) 37(-0.5,-7.7) 38(0,-7.7) 39(0.5,-7.7) 40(1,-7.7) 41(1.5,-7.7) 42(2,-7.7) 43(2.5,-7.7) 44(3,-7.7) 45(3.5,-7.7) 46(4,-7.7) 47(4.5,-7.7) 48(5,-7.7) 49(5.5,-7.7) 50(6,-7.7) 76(6,7.7) 77(5.5,7.7) 78(5,7.7) 79(4.5,7.7) 80(4,7.7) 81(3.5,7.7) 82(3,7.7) 83(2.5,7.7) 84(2,7.7) 85(1.5,7.7) 86(1,7.7) 87(0.5,7.7) 88(0,7.7) 89(-0.5,7.7) 90(-1,7.7) 91(-1.5,7.7) 92(-2,7.7) 93(-2.5,7.7) 94(-3,7.7) 95(-3.5,7.7) 96(-4,7.7) 97(-4.5,7.7) 98(-5,7.7) 99(-5.5,7.7) 100(-6,7.7)
  silkscreen extent -7.82,-6.6 6.6,6.82, body extent -8,-8 8,8, height 1.05
U_SOT95P280X145-6N [mm] "SOT-23, 6-Leads, Body 2.90x2.80mm, Pitch 0.95mm, IPC Medium Density"
  rrect50% 0.95x0.6 smd: 1(-1.35,0.95) 2(-1.35,0) 3(-1.35,-0.95) 4(1.35,-0.95) 5(1.35,0) 6(1.35,0.95)
  silkscreen extent -1.47,-1.55 0.5,1.92, body extent -1.4,-1.53 1.4,1.53, height 1.45
U_TSOP64P600X135-16N [mm] "TSOP, 16-Leads, Body 4.90x3.91mm, Pitch 0.64mm, IPC Medium Density"
  oval 1.25x0.4 smd: 1(-2.8,2.222) 2(-2.8,1.587) 3(-2.8,0.952) 4(-2.8,0.317) 5(-2.8,-0.318) 6(-2.8,-0.953) 7(-2.8,-1.588) 8(-2.8,-2.222) 9(2.8,-2.222) 10(2.8,-1.587) 11(2.8,-0.952) 12(2.8,-0.317) 13(2.8,0.318) 14(2.8,0.953) 15(2.8,1.588) 16(2.8,2.222)
  silkscreen extent -2.92,-2.45 1.78,3.1, body extent -3,-2.45 3,2.45, height 1.35
Y_CHIPP320X250-4N [mm] "Chip Oscillator , 4-Leads, Body 3.20x2.50mm, IPC Medium Density"
  rrect50% 1.4x1.2 smd: 1(-1.1,-0.8) 2(1.1,-0.8) 3(1.1,0.8) 4(-1.1,0.8)
  silkscreen extent -2.12,-1.92 1.2,1.8, body extent -1.6,-1.25 1.6,1.25, height 1.2

## Part data
C1 C4 C7 C8 C9 C10 C11 C12 C13 C14 C15 C25 C26 C27 C28 C30 C34 C35 C36 C40 C43 C45: library part C_C0805C104K5RACTU, "C CERAMIC 100nF 50V 10% 2012", Dielectric=X7R, Manufacturer=Kemet, Package=2012, Part Number=C0805C104K5RACTU, Supplier Part Number 1=399-1170-1-ND, Temperature Range="-55degC to 125degC", Tolerance=+/-10%, Voltage=50V, Capacitance=100nF, Datasheet URL=https://content.kemet.com/datasheets/KEM_C1002_X7R_SMD.pdf, ESR=n/a, Mounting=SMT, Pin Count=2, Price=0.23, Price Currency=CHF, Supplier 1=Digi-Key
C2 C41 C42 C46 C47: library part C_C1206C226K8RAC7800, "C CERAMIC 22uF 10V 10% 3216", Dielectric=X7R, Manufacturer=Kemet, Package=3216, Part Number=C1206C226K8RAC7800, Supplier Part Number 1=399-11947-1-ND, Temperature Range="-55degC to 125degC", Tolerance=+/-10%, Voltage=10V, Capacitance=22uF, Datasheet URL=https://api.kemet.com/component-edge/download/datasheet/C1206C226K8RAC7800.pdf, ESR=n/a, Mounting=SMT, Pin Count=2, Price=0.65, Price Currency=CHF, Supplier 1=Digi-Key
C3: library part C_C0805C102K5RACTU, "C CERAMIC 1nF 50V 10% 2012", Dielectric=X7R, Manufacturer=Kemet, Package=2012, Part Number=C0805C102K5RACTU, Supplier Part Number 1=399-1147-1-ND, Temperature Range="-55degC to 125degC", Tolerance=+/-10%, Voltage=50V, Capacitance=1nF, Datasheet URL=https://content.kemet.com/datasheets/KEM_C1002_X7R_SMD.pdf, ESR=n/a, Mounting=SMT, Pin Count=2, Price=0.11, Price Currency=CHF, Supplier 1=Digi-Key
C5 C6 C16 C20 C21 C22 C23 C29: library part C_C0805C103K5RACTU, "C CERAMIC 10nF 50V 10% 2012", Dielectric=X7R, Manufacturer=Kemet, Package=2012, Part Number=C0805C103K5RACTU, Supplier Part Number 1=399-1158-1-ND, Temperature Range="-55degC to 125degC", Tolerance=+/-10%, Voltage=50V, Capacitance=10nF, Datasheet URL=https://content.kemet.com/datasheets/KEM_C1002_X7R_SMD.pdf, ESR=n/a, Mounting=SMT, Pin Count=2, Price=0.18, Price Currency=CHF, Supplier 1=Digi-Key
C17 C19 C37 C38 C48 C49: library part C_C0805C105K5RACTU, "C CERAMIC 1uF 50V 10% 2012", Dielectric=X7R, Manufacturer=Kemet, Package=2012, Part Number=C0805C105K5RACTU, Supplier Part Number 1=399-7409-1-ND, Temperature Range="-55degC to 125degC", Tolerance=+/-10%, Voltage=50V, Capacitance=1uF, Datasheet URL=https://content.kemet.com/datasheets/KEM_C1002_X7R_SMD.pdf, ESR=n/a, Mounting=SMT, Pin Count=2, Price=0.32, Price Currency=CHF, Supplier 1=Digi-Key
C18 C39 C44: library part C_C1206C106K3RACTU, "C CERAMIC 10uF 25V 10% 3216", Dielectric=X7R, Manufacturer=Kemet, Package=3216, Part Number=C1206C106K3RACTU, Supplier Part Number 1=399-7442-1-ND, Temperature Range="-55degC to 125degC", Tolerance=+/-10%, Voltage=25V, Capacitance=10uF, Datasheet URL=https://content.kemet.com/datasheets/KEM_C1002_X7R_SMD.pdf, ESR=n/a, Mounting=SMT, Pin Count=2, Price=0.62, Price Currency=CHF, Supplier 1=Digi-Key
C24 C33: library part C_C0805C224K5RACTU, "C CERAMIC 220nF 50V 10% 2012", Dielectric=X7R, Manufacturer=Kemet, Package=2012, Part Number=C0805C224K5RACTU, Supplier Part Number 1=399-3491-1-ND, Temperature Range="-55degC to 125degC", Tolerance=+/-10%, Voltage=50V, Capacitance=220nF, Datasheet URL=https://content.kemet.com/datasheets/KEM_C1002_X7R_SMD.pdf, ESR=n/a, Mounting=SMT, Pin Count=2, Price=0.16, Price Currency=CHF, Supplier 1=Digi-Key
C31 C32: library part C_C0805C470K5GACTU, "C CERAMIC 47pF 50V 10% 2012", Dielectric=C0G, Manufacturer=Kemet, Package=2012, Part Number=C0805C470K5GACTU, Supplier Part Number 1=399-8081-1-ND, Temperature Range="-55degC to 125degC", Tolerance=+/-10%, Voltage=50V, Capacitance=47pF, Datasheet URL=https://api.kemet.com/component-edge/download/datasheet/C0805C470K5GACTU.pdf, ESR=n/a, Mounting=SMT, Pin Count=2, Price=0.11, Price Currency=CHF, Supplier 1=Digi-Key
D1: library part D_DRTR5V0U4S-7, "D TVS 5.5V 6V 200mW SOT-363", Manufacturer="Diodes Incorporated", Package=SOT-363, Power=200mW, Supplier Part Number 1=DRTR5V0U4S-7DICT-ND, Temperature Range="-65degC to 150degC", Voltage Breakdown=6V, Voltage Reverse Standoff=5.5V, Datasheet URL=https://www.diodes.com/assets/Datasheets/DRTR5V0U4S.pdf, Mounting=SMT, Part Number=DRTR5V0U4S-7, Pin Count=6, Price=0.39, Price Currency=CHF, Supplier 1=Digi-Key
D2 D3 D4 D5: library part D_APT2012LZGCK, "D LED GREEN CLEAR 2.65V 2mA 2012", Color=Green, Current Forward=2mA, Current Reverse=50uA, Manufacturer=Kingbright, Package=2012, Power=102.5mW, Supplier Part Number 1=754-1939-1-ND, Temperature Range="-40degC to 85degC", Voltage Forward=2.65V, Voltage Reverse=5V, Datasheet URL=http://www.kingbrightusa.com/images/catalog/SPEC/APT2012LZGCK.pdf, Lens Transparency=Clear, Mounting=SMT, Part Number=APT2012LZGCK, Pin Count=2, Price=0.55, Price Currency=CHF, Supplier 1=Digi-Key
FB1 FB2 FB3 FB4 FB5: library part FB_BLM31KN121SN1L, "FB 120R 100MHz 6A 3216", Current=6A, Manufacturer="Murata Electronics", Package=3216, Part Number=BLM31KN121SN1L, Resistance=9mR, Supplier Part Number 1=490-16524-1-ND, Temperature Range="-55degC to 125degC", Datasheet URL=https://www.murata.com/en-us/products/productdata/8801529331742/ENFA0091.pdf, Impedance="120R 100MHz", Mounting=SMT, Pin Count=2, Price=0.29, Price Currency=CHF, Supplier 1=Digi-Key
H1: library part H_TSW-106-08-G-S-RA, "H GENERAL HEADER 6POS 1ROW 2.54mm ANGLE THT", Current=5.7A, Manufacturer="Samtec Inc.", Package=n/a, Supplier Part Number 1=SAM1039-06-ND, Temperature Range="-55degC to 125degC", Voltage="550VAC, 770VDC", Datasheet URL=http://suddendocs.samtec.com/catalog_english/tsw_th.pdf, Header Type=Header, Mating Cycles=n/a, Mounting=THT, Orientation=Angle, Part Number=TSW-106-08-G-S-RA, Pin Count=6, Positions=6, Price=0.68, Price Currency=CHF, Rows=1, Spacing=2.54mm, Supplier 1=Digi-Key
H2: library part H_J3011G21DNL, "H RJ45 SOCKET 1PORT ANGLE SMT", Current=n/a, Manufacturer=Pulse, Supplier Part Number 1=553-1491-ND, Temperature Range="0°C to 70°C", Datasheet URL=https://productfinder.pulseeng.com/doc_type/WEB301/doc_num/J409/doc_part/J409.pdf, Header Type=Socket, Mating Cycles=n/a, Mounting=SMT, Orientation=Angle, Package=n/a, Part Number=J3011G21DNL, Pin Count=13, Ports=1, Price=8.68, Price Currency=CHF, Supplier 1=Digi-Key, Voltage=n/a
H3: library part H_897-43-005-00-100001, "H USB SOCKET 1PORT B-MINI ANGLE SMT", Current=1A, Manufacturer="Mill-Max Manufacturing Corp.", Package=n/a, Supplier Part Number 1=ED90341CT-ND, Voltage=30VAC, Datasheet URL=http://www.farnell.com/datasheets/1734713.pdf?_ga=2.223747291.1932968036.1561574157-1154557334.1561574157&_gac=1.227804655.1561574157.CjwKCAjwr8zoBRA0EiwANmvpYNQHn877f_ACzLNOCpO9cVZHUYePGKu6J6mtcTAYQ9aGUVPIBV0ilRoC6_EQAvD_BwE, Header Type=Socket, Mating Cycles=5000, Mounting=SMT, Orientation=Angle, Part Number=897-43-005-00-100001, Pin Count=6, Ports=1, Price=1.21, Price Currency=CHF, Supplier 1=Digi-Key, Temperature Range=n/a, Usb Type=B-Mini
H4: library part H_76382-302LF, "H GENERAL HEADER 2POS 1ROW 2.54mm ANGLE THT", Current=3A, Manufacturer="Amphenol ICC", Package=n/a, Supplier Part Number 1=609-1278-ND, Temperature Range="-40degC to 125degC", Voltage=1000V, Datasheet URL=https://cdn.amphenol-icc.com/media/wysiwyg/files/drawing/76382.pdf, Header Type=Header, Mating Cycles=1000, Mounting=THT, Orientation=Angle, Part Number=76382-302LF, Pin Count=2, Positions=2, Price=0.71, Price Currency=CHF, Rows=1, Spacing=2.54mm, Supplier 1=Digi-Key
H5 H6: library part H_SSW-105-02-G-D-RA, "H GENERAL SOCKET 10POS 2ROW 2.54mm ANGLE THT", Current=5.7A, Manufacturer="Samtec Inc.", Package=n/a, Supplier Part Number 1=SAM1215-05-ND, Temperature Range="-55degC to 125degC", Voltage="465VAC, 655VDC", Datasheet URL=http://suddendocs.samtec.com/catalog_english/ssw_th.pdf, Header Type=Socket, Mating Cycles=n/a, Mounting=THT, Orientation=Angle, Part Number=SSW-105-02-G-D-RA, Pin Count=10, Positions=10, Price=1.51, Price Currency=CHF, Rows=2, Spacing=2.54mm, Supplier 1=Digi-Key
H7: library part H_TSW-103-08-G-S-RA, "H GENERAL HEADER 3POS 1ROW 2.54mm ANGLE THT", Current=5.7A, Manufacturer="Samtec Inc.", Package=n/a, Supplier Part Number 1=SAM1039-03-ND, Temperature Range="-55degC to 125degC", Voltage="550VAC, 770VDC", Datasheet URL=http://suddendocs.samtec.com/catalog_english/tsw_th.pdf, Header Type=Header, Mating Cycles=n/a, Mounting=THT, Orientation=Angle, Part Number=TSW-103-08-G-S-RA, Pin Count=3, Positions=3, Price=0.40, Price Currency=CHF, Rows=1, Spacing=2.54mm, Supplier 1=Digi-Key
JP1 JP2 JP3: library part JP_SOLDER-2POS-1308, "JP SOLDER 2POS 1308", Manufacturer=n/a, Datasheet URL=n/a, Mounting=SMT, Package=1308, Part Number=n/a, Pin Count=2, Price=n/a, Price Currency=n/a, Supplier 1=n/a, Supplier Part Number 1=n/a, Temperature Range=n/a
L1 L2: library part L_LQM2HPN4R7MG0L, "L CERAMIC 4.7uH 1.1A 138mR 2520", Current=1.1A, Manufacturer="Murata Electronics", Package=2520, Part Number=LQM2HPN4R7MG0L, Resistance=138mR, Supplier Part Number 1=490-5116-1-ND, Temperature Range="-55degC to 125degC", Tolerance=+/-20%, Voltage=n/a, Datasheet URL=https://search.murata.co.jp/Ceramy/image/img/P02/JELF243B-0019.pdf, Inductance=4.7uH, Mounting=SMT, Pin Count=2, Price=0.28, Price Currency=CHF, Supplier 1=Digi-Key
Q1 Q2 Q3: library part Q_DMG1012UW-7, "Q MOSFET N-CH 20V 1A SOT-323", Current Drain=1A, Manufacturer="Diodes Incorporated", Package=SOT-323, Power=290mW, Supplier Part Number 1=DMG1012UW-7DICT-ND, Temperature Range="-55degC to 150degC", Voltage Drain Source=20V, Voltage Gate Source=+/-6V, Datasheet URL=https://www.diodes.com/assets/Datasheets/ds31859.pdf, Mosfet Type=N-CH, Mounting=SMT, Part Number=DMG1012UW-7, Pin Count=3, Price=0.39, Price Currency=CHF, Supplier 1=Digi-Key
R1 R2 R3 R4 R5 R6 R7 R8 R9 R10 R11 R12 R13 R14 R15 R19 R20 R31 R55 R56 R57: library part R_ERJ-6ENF3300V, "R SMT 330R 1% 125mW 2012", Manufacturer=Panasonic, Package=2012, Part Number=ERJ-6ENF3300V, Power=125mW, Supplier Part Number 1=P330CCT-ND, Temperature Coefficient=100ppm/degC, Temperature Range="-55degC to 155degC", Tolerance=+/-1%, Voltage=150V, Datasheet URL=https://industrial.panasonic.com/cdbs/www-data/pdf/RDA0000/AOA0000C304.pdf, Mounting=SMT, Pin Count=2, Price=0.10, Price Currency=CHF, Resistance=330R, Supplier 1=Digi-Key
R16 R17: library part R_RMCF0805FT4K70, "R SMT 4.7kR 1% 125mW 2012", Manufacturer="Stackpole Electronics Inc", Package=2012, Part Number=RMCF0805FT4K70, Power=125mW, Supplier Part Number 1=RMCF0805FT4K70RCT-ND, Temperature Coefficient=100ppm/degC, Temperature Range="-55degC to 155degC", Tolerance=+/-1%, Voltage=150V, Datasheet URL=https://www.seielect.com/catalog/sei-rmcf_rmcp.pdf, Mounting=SMT, Pin Count=2, Price=0.10, Price Currency=CHF, Resistance=4.7kR, Supplier 1=Digi-Key
R18 R22 R28 R29 R30 R38 R54 R58 R59 R60 R61 R64 R67: library part R_RMCF0805FT10K0, "R SMT 10kR 1% 125mW 2012", Manufacturer="Stackpole Electronics Inc", Package=2012, Part Number=RMCF0805FT10K0, Power=125mW, Supplier Part Number 1=RMCF0805FT10K0CT-ND, Temperature Coefficient=100ppm/degC, Temperature Range="-55degC to 155degC", Tolerance=+/-1%, Voltage=150V, Datasheet URL=https://www.seielect.com/catalog/sei-rmcf_rmcp.pdf, Mounting=SMT, Pin Count=2, Price=0.10, Price Currency=CHF, Resistance=10kR, Supplier 1=Digi-Key
R21 R23 R24 R25 R39 R40 R41 R44 R49 R50 R51 R52 R53: library part R_RMCF0805FT33R0, "R SMT 33R 1% 125mW 2012", Manufacturer="Stackpole Electronics Inc", Package=2012, Part Number=RMCF0805FT33R0, Power=125mW, Supplier Part Number 1=RMCF0805FT33R0CT-ND, Temperature Coefficient=100ppm/degC, Temperature Range="-55degC to 155degC", Tolerance=+/-1%, Voltage=150V, Datasheet URL=https://www.seielect.com/catalog/sei-rmcf_rmcp.pdf, Mounting=SMT, Pin Count=2, Price=0.10, Price Currency=CHF, Resistance=33R, Supplier 1=Digi-Key
R26 R27: library part R_RMCF0805FT1R00, "R SMT 1R 1% 125mW 2012", Manufacturer="Stackpole Electronics Inc", Package=2012, Part Number=RMCF0805FT1R00, Power=125mW, Supplier Part Number 1=RMCF0805FT1R00CT-ND, Temperature Coefficient=100ppm/degC, Temperature Range="-55degC to 155degC", Tolerance=+/-1%, Voltage=150V, Datasheet URL=https://www.seielect.com/catalog/sei-rmcf_rmcp.pdf, Mounting=SMT, Pin Count=2, Price=0.10, Price Currency=CHF, Resistance=1R, Supplier 1=Digi-Key
R32 R33 R43 R45 R46 R47: library part R_RMCF0805FT1K00, "R SMT 1kR 1% 125mW 2012", Manufacturer="Stackpole Electronics Inc", Package=2012, Part Number=RMCF0805FT1K00, Power=125mW, Supplier Part Number 1=RMCF0805FT1K00CT-ND, Temperature Coefficient=100ppm/degC, Temperature Range="-55degC to 155degC", Tolerance=+/-1%, Voltage=150V, Datasheet URL=https://www.seielect.com/catalog/sei-rmcf_rmcp.pdf, Mounting=SMT, Pin Count=2, Price=0.10, Price Currency=CHF, Resistance=1kR, Supplier 1=Digi-Key
R34 R35 R36 R37: library part R_RMCF0805FT49R9, "R SMT 49.9R 1% 125mW 2012", Manufacturer="Stackpole Electronics Inc", Package=2012, Part Number=RMCF0805FT49R9, Power=125mW, Supplier Part Number 1=RMCF0805FT49R9CT-ND, Temperature Coefficient=100ppm/degC, Temperature Range="-55degC to 155degC", Tolerance=+/-1%, Voltage=150V, Datasheet URL=https://www.seielect.com/catalog/sei-rmcf_rmcp.pdf, Mounting=SMT, Pin Count=2, Price=0.10, Price Currency=CHF, Resistance=49.9R, Supplier 1=Digi-Key
R42: library part R_RMCF0805FT18K7, "R SMT 18.7kR 1% 125mW 2012", Manufacturer="Stackpole Electronics Inc", Package=2012, Part Number=RMCF0805FT18K7, Power=125mW, Supplier Part Number 1=RMCF0805FT18K7CT-ND, Temperature Coefficient=100ppm/degC, Temperature Range="-55degC to 155degC", Tolerance=+/-1%, Voltage=150V, Datasheet URL=https://www.seielect.com/catalog/sei-rmcf_rmcp.pdf, Mounting=SMT, Pin Count=2, Price=0.10, Price Currency=CHF, Resistance=18.7kR, Supplier 1=Digi-Key
R48: library part R_RMCF0805FT1K91, "R SMT 1.91kR 1% 125mW 2012", Manufacturer="Stackpole Electronics Inc", Package=2012, Part Number=RMCF0805FT1K91, Power=125mW, Supplier Part Number 1=738-RMCF0805FT1K91CT-ND, Temperature Coefficient=100ppm/degC, Temperature Range="-55degC to 155degC", Tolerance=+/-1%, Voltage=150V, Datasheet URL=https://www.seielect.com/catalog/sei-rmcf_rmcp.pdf, Mounting=SMT, Pin Count=2, Price=0.10, Price Currency=CHF, Resistance=1.91kR, Supplier 1=Digi-Key
R62 R65: library part R_RMCF0805FT30R0, "R SMT 30R 1% 125mW 2012", Manufacturer="Stackpole Electronics Inc", Package=2012, Part Number=RMCF0805FT30R0, Power=125mW, Supplier Part Number 1=RMCF0805FT30R0CT-ND, Temperature Coefficient=100ppm/degC, Temperature Range="-55degC to 155degC", Tolerance=+/-1%, Voltage=150V, Datasheet URL=https://www.seielect.com/catalog/sei-rmcf_rmcp.pdf, Mounting=SMT, Pin Count=2, Price=0.10, Price Currency=CHF, Resistance=30R, Supplier 1=Digi-Key
R63: library part R_RMCF0805FT52K3, "R SMT 52.3kR 1% 125mW 2012", Manufacturer="Stackpole Electronics Inc", Package=2012, Part Number=RMCF0805FT52K3, Power=125mW, Supplier Part Number 1=RMCF0805FT52K3CT-ND, Temperature Coefficient=100ppm/degC, Temperature Range="-55degC to 155degC", Tolerance=+/-1%, Voltage=150V, Datasheet URL=https://www.seielect.com/catalog/sei-rmcf_rmcp.pdf, Mounting=SMT, Pin Count=2, Price=0.10, Price Currency=CHF, Resistance=52.3kR, Supplier 1=Digi-Key
R66: library part R_RMCF0805FT31K6, "R SMT 31.6kR 1% 125mW 2012", Manufacturer="Stackpole Electronics Inc", Package=2012, Part Number=RMCF0805FT31K6, Power=125mW, Supplier Part Number 1=RMCF0805FT31K6CT-ND, Temperature Coefficient=100ppm/degC, Temperature Range="-55degC to 155degC", Tolerance=+/-1%, Voltage=150V, Datasheet URL=https://www.seielect.com/catalog/sei-rmcf_rmcp.pdf, Mounting=SMT, Pin Count=2, Price=0.10, Price Currency=CHF, Resistance=31.6kR, Supplier 1=Digi-Key
R68: library part R_RMCF0805FT330R, "R SMT 330R 1% 125mW 2012", Manufacturer="Stackpole Electronics Inc", Package=2012, Part Number=RMCF0805FT330R, Power=125mW, Supplier Part Number 1=RMCF0805FT330RCT-ND, Temperature Coefficient=100ppm/degC, Temperature Range="-55degC to 155degC", Tolerance=+/-1%, Voltage=150V, Datasheet URL=https://www.seielect.com/catalog/sei-rmcf_rmcp.pdf, Mounting=SMT, Pin Count=2, Price=0.10, Price Currency=CHF, Resistance=330R, Supplier 1=Digi-Key
R69: library part R_RMCF0805FT1K20, "R SMT 1.2kR 1% 125mW 2012", Manufacturer="Stackpole Electronics Inc", Package=2012, Part Number=RMCF0805FT1K20, Power=125mW, Supplier Part Number 1=RMCF0805FT1K20CT-ND, Temperature Coefficient=100ppm/degC, Temperature Range="-55degC to 155degC", Tolerance=+/-1%, Voltage=150V, Datasheet URL=https://www.seielect.com/catalog/sei-rmcf_rmcp.pdf, Mounting=SMT, Pin Count=2, Price=0.10, Price Currency=CHF, Resistance=1.2kR, Supplier 1=Digi-Key
S1 S2 S3: library part S_PTS645SL50SMTR92LFS, "S TACTILE SPST-NO 12V 50mA SMT", Current=50mA, Manufacturer=C&K, Package=n/a, Supplier Part Number 1=CKN9088CT-ND, Temperature Range="-20degC to 60degC", Voltage=12V, Cycles Electrical=n/a, Cycles Mechanical=100000, Datasheet URL=https://dznh3ojzb2azq.cloudfront.net/products/Tactile/PTS645/documents/datasheet.pdf, Mounting=SMT, Part Number="PTS645SL50SMTR92 LFS", Pin Count=4, Price=0.30, Price Currency=CHF, Supplier 1=Digi-Key, Switch Type=SPST-NO
TP1 TP2 TP3 TP4: library part TP_5006, "TP COMPACT BLACK THT", Color=Black, Current=n/a, Manufacturer="Keystone Electronics", Supplier Part Number 1=36-5006-ND, Datasheet URL=https://www.keyelco.com/userAssets/file/M65p56.pdf, Mounting=THT, Package=n/a, Part Number=5006, Pin Count=1, Price=0.35, Price Currency=CHF, Supplier 1=Digi-Key, Temperature Range=n/a, Voltage=n/a
U1: library part U_PIC32MZ1024EFE100-I/PF, "U MCU 32BIT 1MB 100-TQFP", Current Output=5mA, Manufacturer="Microchip Technology", Package=100-TQFN, Supplier Part Number 1=579-MZ1024EFE100IPF, Temperature Range="-40degC to 85degC", Voltage Input="2.1V to 3.6V", Bit Count=32, Datasheet URL=https://www.mouser.ch/datasheet/2/268/mchp_s_a0007771640_1-2274641.pdf, Memory Size=1MB, Mounting=SMT, Part Number=PIC32MZ1024EFE100-I/PF, Pin Count=100, Price=11.03, Price Currency=CHF, Supplier 1=Mouser
U2: library part U_ICS1894-33, "U TRANSCEIVER RMII-ETHERNET 32-QFN", Manufacturer=Renesas, Package=32-QFN, Supplier Part Number 1=972-1894K-33LF, Temperature Range="0degC to 70degC", Voltage Input=3.3V, Datasheet URL=https://www.mouser.ch/datasheet/2/698/REN_1894_33_DST_20120301-1711194.pdf, Mounting=SMT, Part Number=ICS1894-33, Pin Count=33, Price=4.81, Price Currency=CHF, Supplier 1=Mouser, Transceiver Type=RMII-Ethernet
U3: library part U_FT230XS-R, "U TRANSCEIVER UART-USB 16-SSOP", Manufacturer=FTDI, Package=16-SSOP, Supplier Part Number 1=768-1135-1-ND, Temperature Range="-40degC to 85degC", Voltage Input="3.3V to 5V", Datasheet URL=http://www.ftdichip.com/Support/Documents/DataSheets/ICs/DS_FT230X.pdf, Mounting=SMT, Part Number=FT230XS-R, Pin Count=16, Price=2.02, Price Currency=CHF, Supplier 1=Digi-Key, Transceiver Type=UART-USB
U4 U5: library part U_TPS56339DDCR, "U REGULATOR BUCK 0.8V TO 16V 3A SOT-23-6", Current Output=3A, Manufacturer="Texas Instruments", Package=SOT-23-6, Supplier Part Number 1=296-53568-1-ND, Temperature Range="-40degC to 125degC", Voltage Input="4.5V to 24V", Voltage Output="0.8V to 16V", Datasheet URL=https://www.ti.com/lit/ds/symlink/tps56339.pdf?ts=1604352153609&ref_url=https%253A%252F%252Fwww.ti.com%252Fproduct%252FTPS56339%253FkeyMatch%253DTPS56%2526tisearch%253DSearch-EN-everything%2526usecase%253DGPN, Mounting=SMT, Part Number=TPS56339DDCR, Pin Count=6, Price=1.14, Price Currency=CHF, Regulator Type=Buck, Supplier 1=Digi-Key
Y1: library part Y_ECS-327ATQMV-AS-TR, "Y OSCILLATOR 32.768kHz CMOS SMT", Current=200uA, Manufacturer="ECS Inc.", Package=n/a, Part Number=ECS-327ATQMV-AS-TR, Supplier Part Number 1=XC2826CT-ND, Temperature Range="-40degC to 125degC", Voltage="1.62V to 3.63V", Datasheet URL=https://ecsxtal.com/store/pdf/ECS-327ATQMV.pdf, Frequency=32.768kHz, Mounting=SMT, Pin Count=4, Price=1.27, Price Currency=CHF, Supplier 1=Digi-Key, Technology=CMOS
Y2: library part Y_ECS-3225MV-240-CN-TR, "Y OSCILLATOR 24MHz HCMOS SMT", Current=4mA, Manufacturer="ECS Inc.", Package=n/a, Part Number=ECS-3225MV-240-CN-TR, Supplier Part Number 1=XC2884CT-ND, Temperature Range="-40degC to 85degC", Voltage="1.62V to 3.63V", Datasheet URL=https://ecsxtal.com/store/pdf/ECS-3225MV.pdf, Frequency=24MHz, Mounting=SMT, Pin Count=4, Price=1.20, Price Currency=CHF, Supplier 1=Digi-Key, Technology=HCMOS
Y3: library part Y_ECS-3225MV-500-BN-TR, "Y OSCILLATOR 50MHz HCMOS SMT", Current=5mA, Manufacturer="ECS Inc.", Package=n/a, Part Number=ECS-3225MV-500-BN-TR, Supplier Part Number 1=XC2881CT-ND, Temperature Range="-40degC to 85degC", Voltage="1.62V to 3.63V", Datasheet URL=https://ecsxtal.com/store/pdf/ECS-3225MV.pdf, Frequency=50MHz, Mounting=SMT, Pin Count=4, Price=1.21, Price Currency=CHF, Supplier 1=Digi-Key, Technology=HCMOS

## Free pads (board coordinates)
  round 7 hole 3.2: 1(5,15) 2(100,7) 3(100,95) 4(5,85)

## Via types
v1: diameter 0.8, hole 0.4, Layer Top to Layer Bottom, tented both sides, 132 vias

## Nets (pads, with @x,y where several pads share a name; then routed paths per layer and width w, separated by ;. In a path a pad name is that pad's centre, name@x,y a point inside that pad or via, vN(x,y) a via of type N, cw(c..) or ccw(c..) an arc to the next point about the centre after c; other vN are vias at no path point)
+3V3: C1.1 C5.2 C6.2 C8.1 C9.1 C10.1 C11.1 C12.1 C13.1 C14.1 C15.1 C16.2 C30.1 C46.2 C47.2 FB2.1 FB3.1 H1.5 H5.1 H6.1 L2.2 R16.2 R17.2 R18.2 R29.2 R54.2 R66.2 R68.2 S1.3 S2.4 S3.4 TP2.1 U1.14 U1.37 U1.46 U1.52 U1.62 U1.74 U1.83 U1.93 U3.3 Y1.1 Y1.4 Y2.1 Y2.4 Y3.1 Y3.4 | length 80.2
  Layer Top w0.2: v1(25.4,18) C30.1 25.448,19.548 U3.3 ; R54.2 v1(31.2,34) ; R66.2 35,67.8 35.8,67 44.6,67 45,67.4 L2.2 ; R29.2 v1(39.2,40.4) ; v1(55,40) FB2.1 ; v1(55.6,48.2) C8.1 55.7,49.5 U1.14 ; v1(63,61.2) C14.1 64.3,61.1 U1.93 ; v1(65.4,38.4) C9.1 67,38.6 67,40.4 66.3,41.1 U1.37 ; Y3.1 Y3.4 C16.2 v1(71,70.8) ; U1.83 69.3,58.9 70,59.6 70,60.8 C13.1 70.8,60.8 v1(70.8,60) ; v1(70,39.6) 70,38.8 C10.1 70.8,38.8 U1.46 ; U1.52 77.9,44.5 C15.1 v1(78,45.8) ; U1.62 75.7,49.5 76.4,48.8 C11.1 v1(78,47.4) ; U1.74 77.5,55.5 C12.1 v1(78,57.4) ; Y2.1 Y2.4 C6.2 v1(78.8,35.4) ; Y1.1 Y1.4 C5.2 v1(85.4,61.2)
+3V3_ETH_VDD: C19.1 C20.2 C21.2 C27.1 R27.2 R42.2 U2.4 U2.7 | length 14.6
  Layer Top w0.2: v1(30.8,38.4) C27.1 R42.2 ; v1(32,50.8) 31.2,50.8 C20.2 31.2,50 34,50 34.25,50.25 U2.4 ; v1(32.6,48.2) 32.6,47.4 C21.2 33.4,47.4 33.4,48.2 33.95,48.75 U2.7 ; v1(39.8,63.6) C19.1
+3V3_ETH_VDDD: C17.1 C23.2 R26.2 U2.25 | length 6.4
  Layer Top w0.2: U2.25 38.95,53.75 39.6,54.4 40.4,54.4 C23.2 40.4,55.2 v1(39.6,55.2) ; v1(39.8,61.6) C17.1
+3V3_ETH_VDDIO: C18.2 C22.2 FB3.2 H2.12 R26.1 R27.1 R28.1 R30.2 R43.2 R47.1 U2.19 | length 13.1
  Layer Top w0.2: H2.12@22.91,56.6 v1(26,56.6) ; v1(30.8,59.6) R28.1 ; U2.19 40.75,49.25 41.2,48.8 43.6,48.8 C22.2 43.6,49.6 v1(42.8,49.6) ; v1(42.4,39.2) R30.2 ; R43.2 v1(51.9,48)
+5V: C28.1 C29.2 C44.2 C45.2 D1.5 H7.2 R69.2 TP1.1 U3.12 U5.3 | length 7.5
  Layer Top w0.2: v1(11.8,25) 12,25 D1.5 ; C28.1 C29.2 26.4,29.6 26.718,29.282 U3.12 ; C28.1 v1(27.6,32.8)
BUCK_+3V3_BOOT: R65.1 U5.6 | length 2.4
  Layer Top w0.2: R65.1 37.45,68.65 U5.6
BUCK_+3V3_FB: R66.1 R67.2 U5.4 | length 4.3
  Layer Top w0.2: R66.1 R67.2 35.05,72.55 U5.4
BUCK_+3V3_SW: C43.1 L2.1 U5.2 | length 5.9
  Layer Top w0.2: U5.2 L2.1 42.8,68.6 C43.1
BUCK_+5V: C41.2 C42.2 H7.1 L1.2 R63.2 | length 12.5
  Layer Top w0.2: C41.2 22.6,72.2 23,72.6 31.8,72.6 32.6,71.8 R63.2
BUCK_+5V_BOOT: R62.1 U4.6 | length 2.4
  Layer Top w0.2: U4.6 30.15,70.95 R62.1
BUCK_+5V_FB: R63.1 R64.2 U4.4 | length 4.3
  Layer Top w0.2: U4.4 32.55,67.05 R64.2 R63.1
BUCK_+5V_SW: C36.1 L1.1 U4.2 | length 5.8
  Layer Top w0.2: C36.1 L1.1 U4.2
BUCK_+5V_VIN: C38.2 C39.2 C40.2 FB4.2 U4.3
CLK_24MHz: R23.1 Y2.3 | length 2.2
  Layer Top w0.2: R23.1 72.6,36.6 Y2.3
CLK_24MHz_PIC: R23.2 U1.49 | length 3.9
  Layer Top w0.2: U1.49 72.3,38.5 R23.2
CLK_32.768kHz: R21.1 Y1.3 | length 2.2
  Layer Top w0.2: Y1.3 84.2,55 R21.1
CLK_32.768kHz_PIC: R21.2 U1.73 | length 7.9
  Layer Top w0.2: U1.73@74.6,55 75.8,55 76,54.8 R21.2
CLK_50MHz: R24.1 R25.1 Y3.3 | length 4.8
  Layer Top w0.2: R25.1 64.8,68.4 65.2,68.8 ; Y3.3 65.2,70.7 65.2,68.8 ; R24.1 65.6,68.4 65.2,68.8
CLK_50MHz_ETH: R25.2 U2.30 | length 33.9
  Layer Top w0.2: U2.30 36.45,55.25 39.2,58 49.6,58 60,68.4 R25.2
CLK_50MHz_PIC: R24.2 U1.16 | length 33.9
  Layer Top w0.2: U1.16@59.2,48.5 60.4,48.5 65.4,48.5 74.9,58 74.9,63.9 70.4,68.4 R24.2
CON_V_IN: C37.2 FB4.1 H4.1
ETH_CRSDV_0: R43.1 R50.2 U2.18 | length 11.1
  Layer Top w0.2: U2.18 40.45,48.75 41.2,48 R43.1 R50.2
ETH_CRSDV_1: R50.1 U1.12 | length 9.5
  Layer Top w0.2: R50.1 52,50 53.2,51.2 57.4,51.2 58.1,50.5 U1.12
ETH_LED_ACT: H2.11 R32.1 | length 4.6
  Layer Top w0.2: H2.11 26.13,54.77 26.1,54.8 v1(26,54.8) ; v1(30.8,57.6) R32.1
ETH_LED_LINK: H2.1 R33.1 | length 6.1
  Layer Top w0.2: H2.1 25.41,43.39 26.8,42 R33.1
ETH_MDC: U1.70 U2.13 | length 73.7
  Layer Top w0.2: U2.13 37.45,45.95 40.2,43.2 45.6,43.2 54.4,34.4 79.2,34.4 81.2,36.4 81.2,51.6 79.3,53.5 U1.70
ETH_MDIO: R30.1 U1.71 U2.12 | length 76.1
  Layer Top w0.2: U2.12 36.95,45.85 40.4,42.4 R30.1 45.6,42.4 54,34 79.6,34 81.6,36 81.6,52 79.6,54 U1.71
ETH_RESET: C24.2 R29.1 R31.2 U2.10 | length 9.2
  Layer Top w0.2: U2.10 35.95,42.45 C24.2 R29.1 R31.2
ETH_RX_N: H2.8 R37.2 U2.2 | length 25
  Layer Top w0.1: H2.8 22.57,51.2 20.4,51.2 20.2,51.4 20.2,55.2 20.573,55.573 26.533,55.573 27.906,54.2 29.387,54.2 29.687,53.9 29.687,53.6 29.286,53.2 R37.2@29.173,53.2 ; R37.2 R37.2@29.173,53.2 ; U2.2 34.675,51.4 33.9,51.4 33.327,51.973 30.106,51.973 29.573,52.506 29.573,52.8 R37.2@29.173,53.2
ETH_RX_P: H2.7 R36.2 U2.1 | length 26
  Layer Top w0.1: H2.7 22.437,50.973 20.306,50.973 19.973,51.306 19.973,55.294 20.479,55.8 26.627,55.8 28,54.427 29.16,54.427 29.481,54.427 29.914,53.994 29.914,53.673 29.914,53.6 R36.2@30.314,53.2 ; R36.2 R36.2@30.314,53.2 ; U2.1 34.675,51.6 34,51.6 33.4,52.2 30.2,52.2 29.8,52.6 29.8,52.8 30.2,53.2 R36.2@30.314,53.2
ETH_RXD0_0: R44.2 U2.17 | length 3.4
  Layer Top w0.2: U2.17 40.15,48.25 41.6,46.8 R44.2
ETH_RXD0_1: R44.1 U1.41 | length 34.8
  Layer Top w0.2: R44.1 45.2,46.8 56.4,35.6 67.6,35.6 68.3,36.3 U1.41
ETH_RXD1_0: R49.2 U2.16 | length 5
  Layer Top w0.2: U2.16 38.95,47.05 41.2,44.8 R49.2
ETH_RXD1_1: R49.1 U1.42 | length 35
  Layer Top w0.2: R49.1 46.4,44.8 56,35.2 68,35.2 68.8,36 U1.42
ETH_RXER_0: R51.2 U2.21 | length 5.1
  Layer Top w0.2: U2.21@39.275,50.25 41.05,50.25 42,51.2 R51.2
ETH_RXER_1: R51.1 U1.35 | length 32.2
  Layer Top w0.2: R51.1 48.8,51.2 49.4,50.6 49.4,43.8 56,37.2 62,37.2 65.3,40.5 U1.35
ETH_TCSR: R42.1 R48.2 U2.8 | length 8.5
  Layer Top w0.2: R42.1 R48.2 34,48 34.25,48.25 U2.8
ETH_TX_N: H2.4 R35.2 U2.5 | length 15
  Layer Top w0.1: H2.4 23.35,47 29.4,47 29.687,47.287 29.687,47.6 R35.2@29.286,48 ; R35.2 R35.2@29.286,48 ; U2.5 34.689,49.613 33.892,49.613 33.506,49.227 30.306,49.227 29.773,48.694 29.773,48.2 29.573,48 R35.2@29.286,48
ETH_TX_P: H2.3 R34.2 U2.6 | length 14.8
  Layer Top w0.1: H2.3 23.243,46.773 29.494,46.773 29.914,47.192 29.914,47.6 R34.2@30.314,48 ; R34.2 R34.2@30.314,48 ; U2.6 34.675,49.4 34,49.4 33.6,49 30.4,49 30,48.6 30,48.2 30.2,48 R34.2@30.314,48
ETH_TXD0_0: R39.1 U1.86 | length 6.9
  Layer Top w0.2: R39.1 66.4,62 67.8,60.6 U1.86
ETH_TXD0_1: R39.2 U2.24 | length 33
  Layer Top w0.2: U2.24@39.275,51.75 40.15,51.75 42,53.6 48,53.6 60.4,66 R39.2@66.342,66
ETH_TXD1_0: R40.1 U1.85 | length 6.3
  Layer Top w0.2: U1.85 68.3,63.9 R40.1
ETH_TXD1_1: R40.2 U2.26 | length 38.6
  Layer Top w0.2: U2.26 38.45,55.25 39.6,56.4 50,56.4 60.6,67 68.2,67 68.4,66.8 R40.2
ETH_TXEN_0: R41.1 U1.77 | length 3.5
  Layer Top w0.2: U1.77 72.3,61.1 R41.1
ETH_TXEN_1: R41.2 U2.23 | length 40
  Layer Top w0.2: U2.23@39.275,51.25 40.45,51.25 42.4,53.2 48.4,53.2 60.2,65 71.4,65 72.4,64 R41.2
GND: C1.2 C2.1 C3.1 C4.2 C5.1 C6.1 C7.2 C8.2 C9.2 C10.2 C11.2 C12.2 C13.2 C14.2 C15.2 C16.1 C17.2 C18.1 C19.2 C20.1 C21.1 C22.1 C23.1 C24.1 C25.2 C26.2 C27.2 C28.2 C29.1 C30.2 C31.1 C32.1 C33.1 C34.2 C35.2 C37.1 C38.1 C39.1 C40.1 C41.1 C42.1 C44.1 C45.1 C46.1 C47.1 C48.1 C49.1 D1.2 D2.1 D3.1 D4.1 D5.1 FB1.2 H1.4 H2.2 H3.5 H4.2 H5.2 H5.10 H6.2 Q1.2 Q2.2 Q3.2 R22.1 R38.1 R45.1 R46.1 R48.1 R60.1 R61.1 R64.1 R67.1 TP3.1 TP4.1 U1.13 U1.31 U1.36 U1.45 U1.53 U1.63 U1.75 U1.84 U1.92 U2.3 U2.9 U2.27 U2.28 U2.33 U3.5 U3.13 U4.1 U5.1 Y1.2 Y2.2 Y3.2 | length 99.3